# Altium PCB BLUENRG-LP_QFN48_VERS3_F_ANTENNA.PcbDoc (part 1 of 3)
Units mm, origin at the board's own origin, x right, y up, seen from the top; angles counter-clockwise.
Board outline 90.84 x 54.03 mm, 4 copper layers (Top Layer, Mid-Layer 1, Mid-Layer 2, Bottom Layer), stack 1.697 mm thick; 156 components, 123 nets, 503 pads, 649 vias.
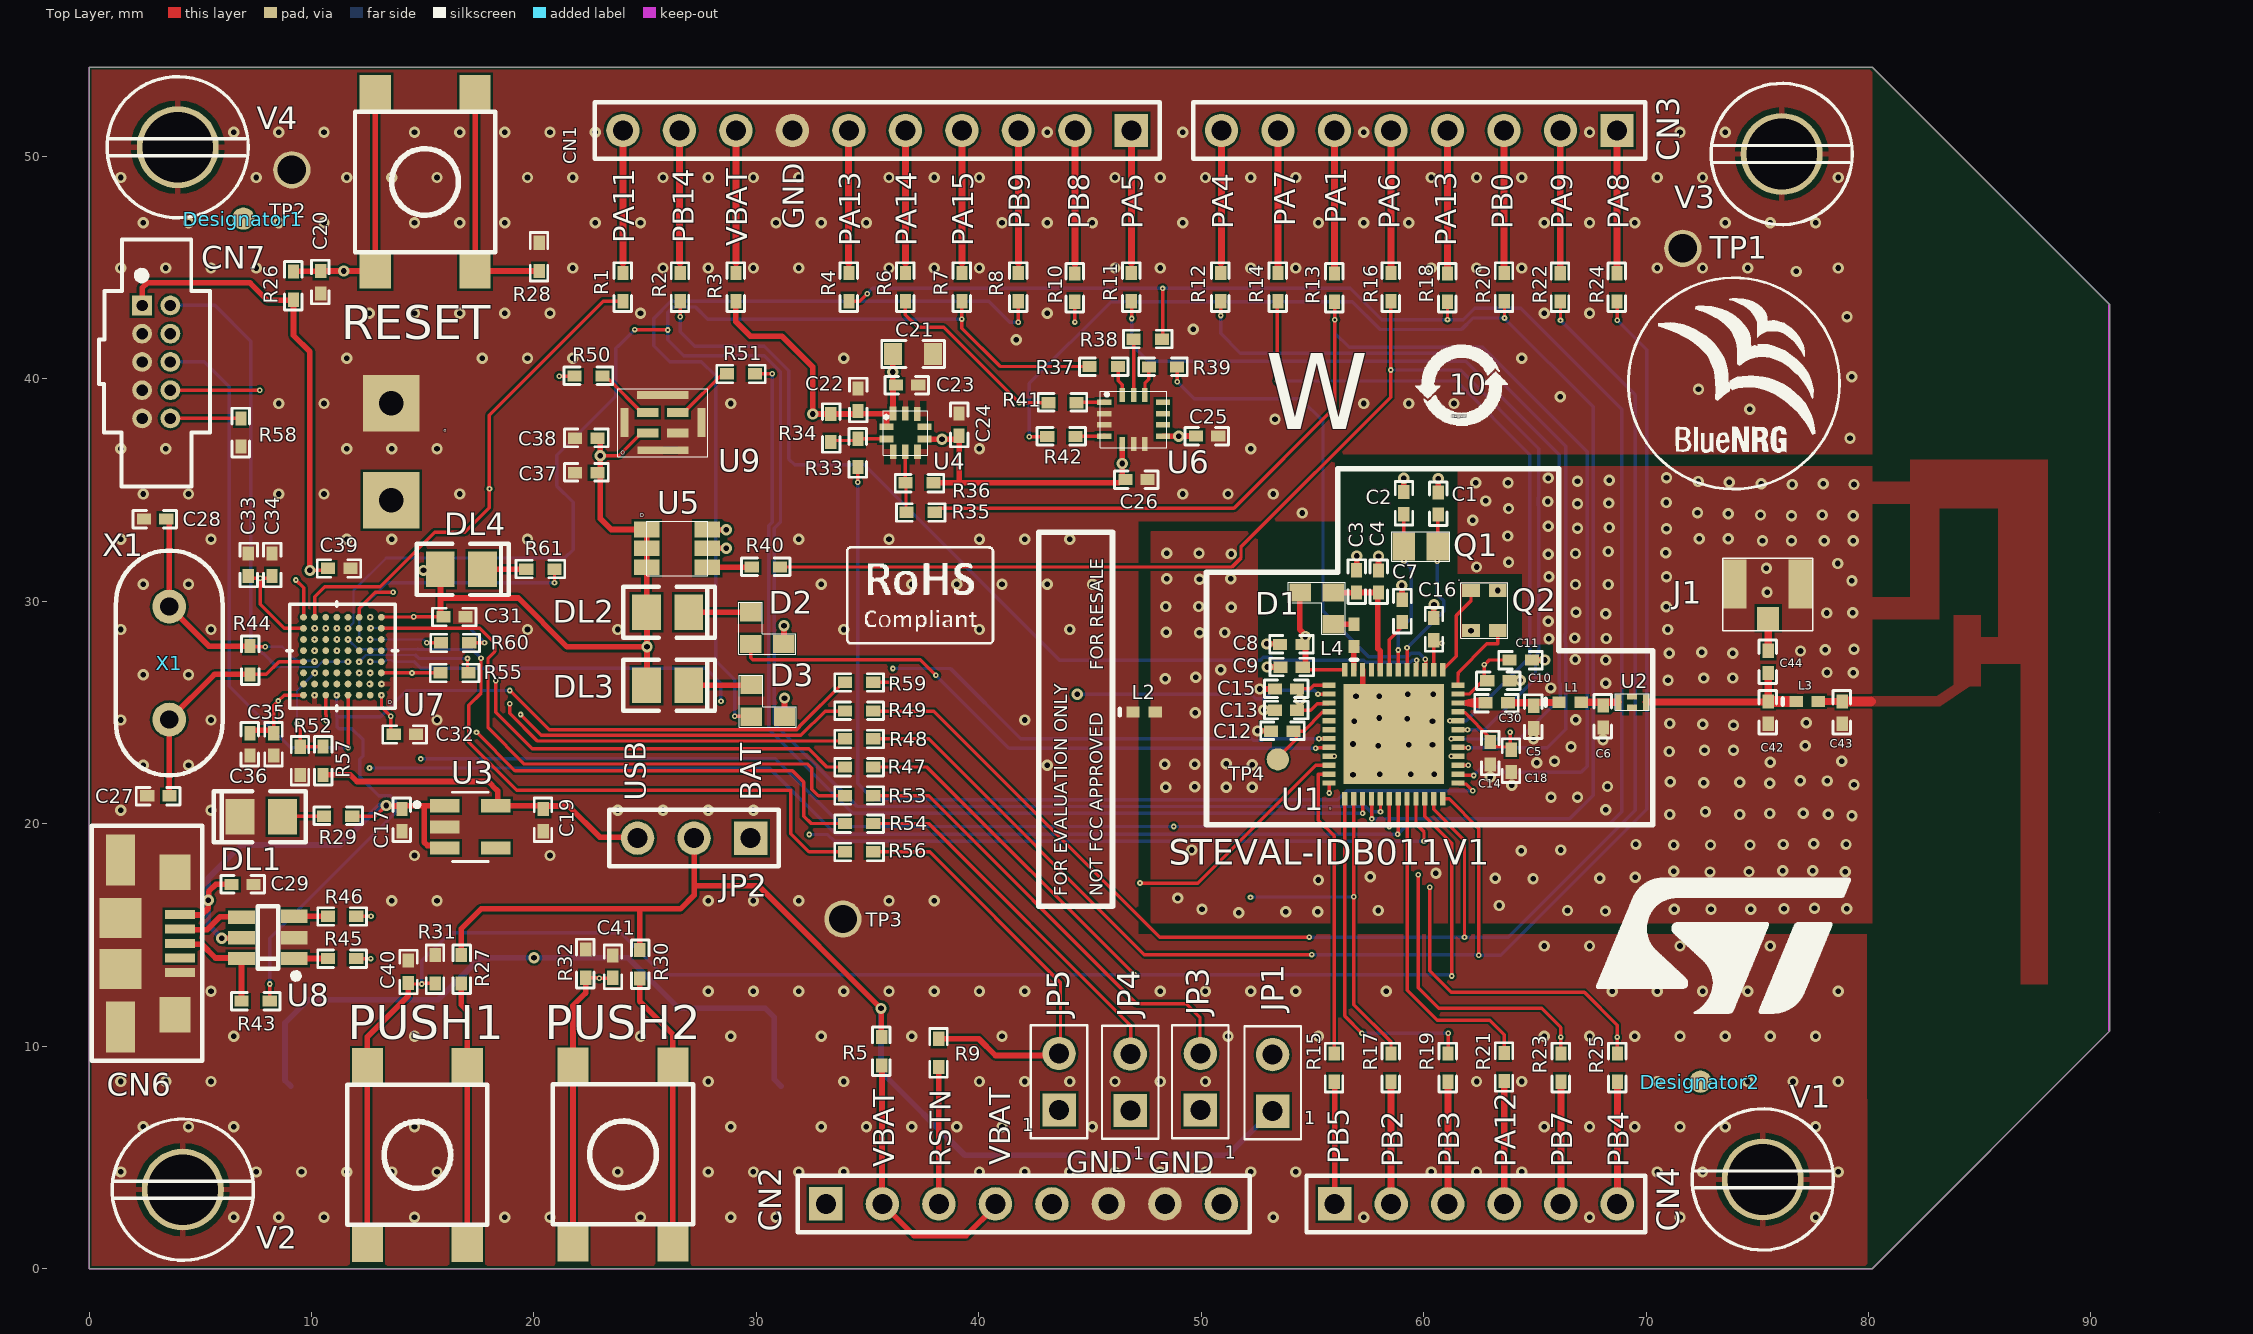
[diagram p0: Top Layer view]
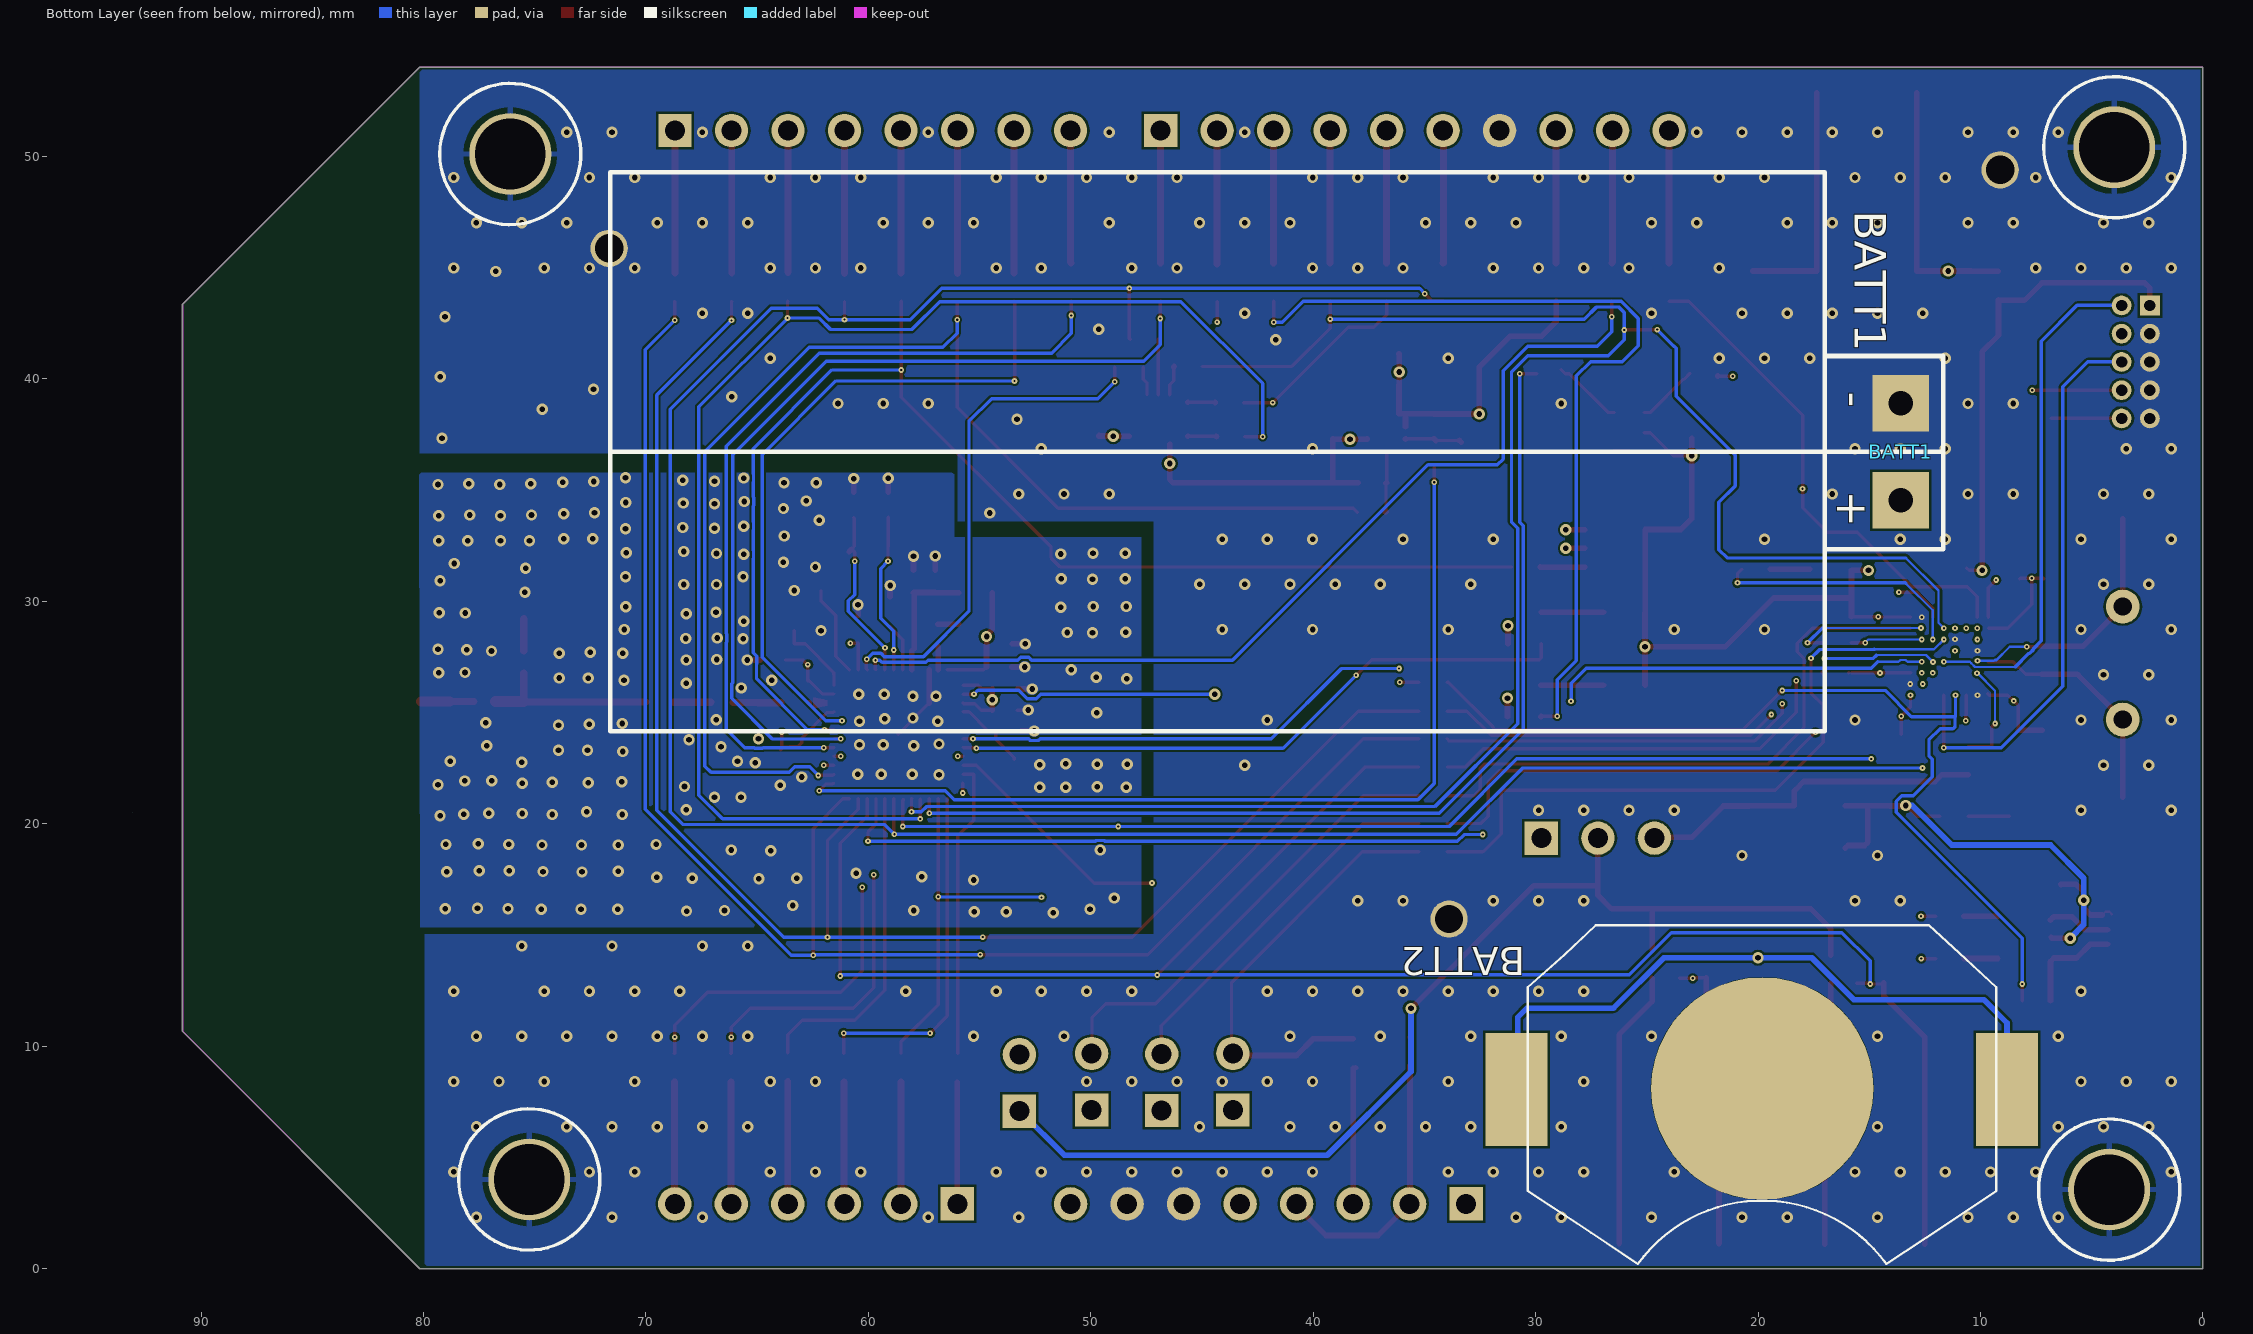
[diagram p1: Bottom Layer view, seen from below]
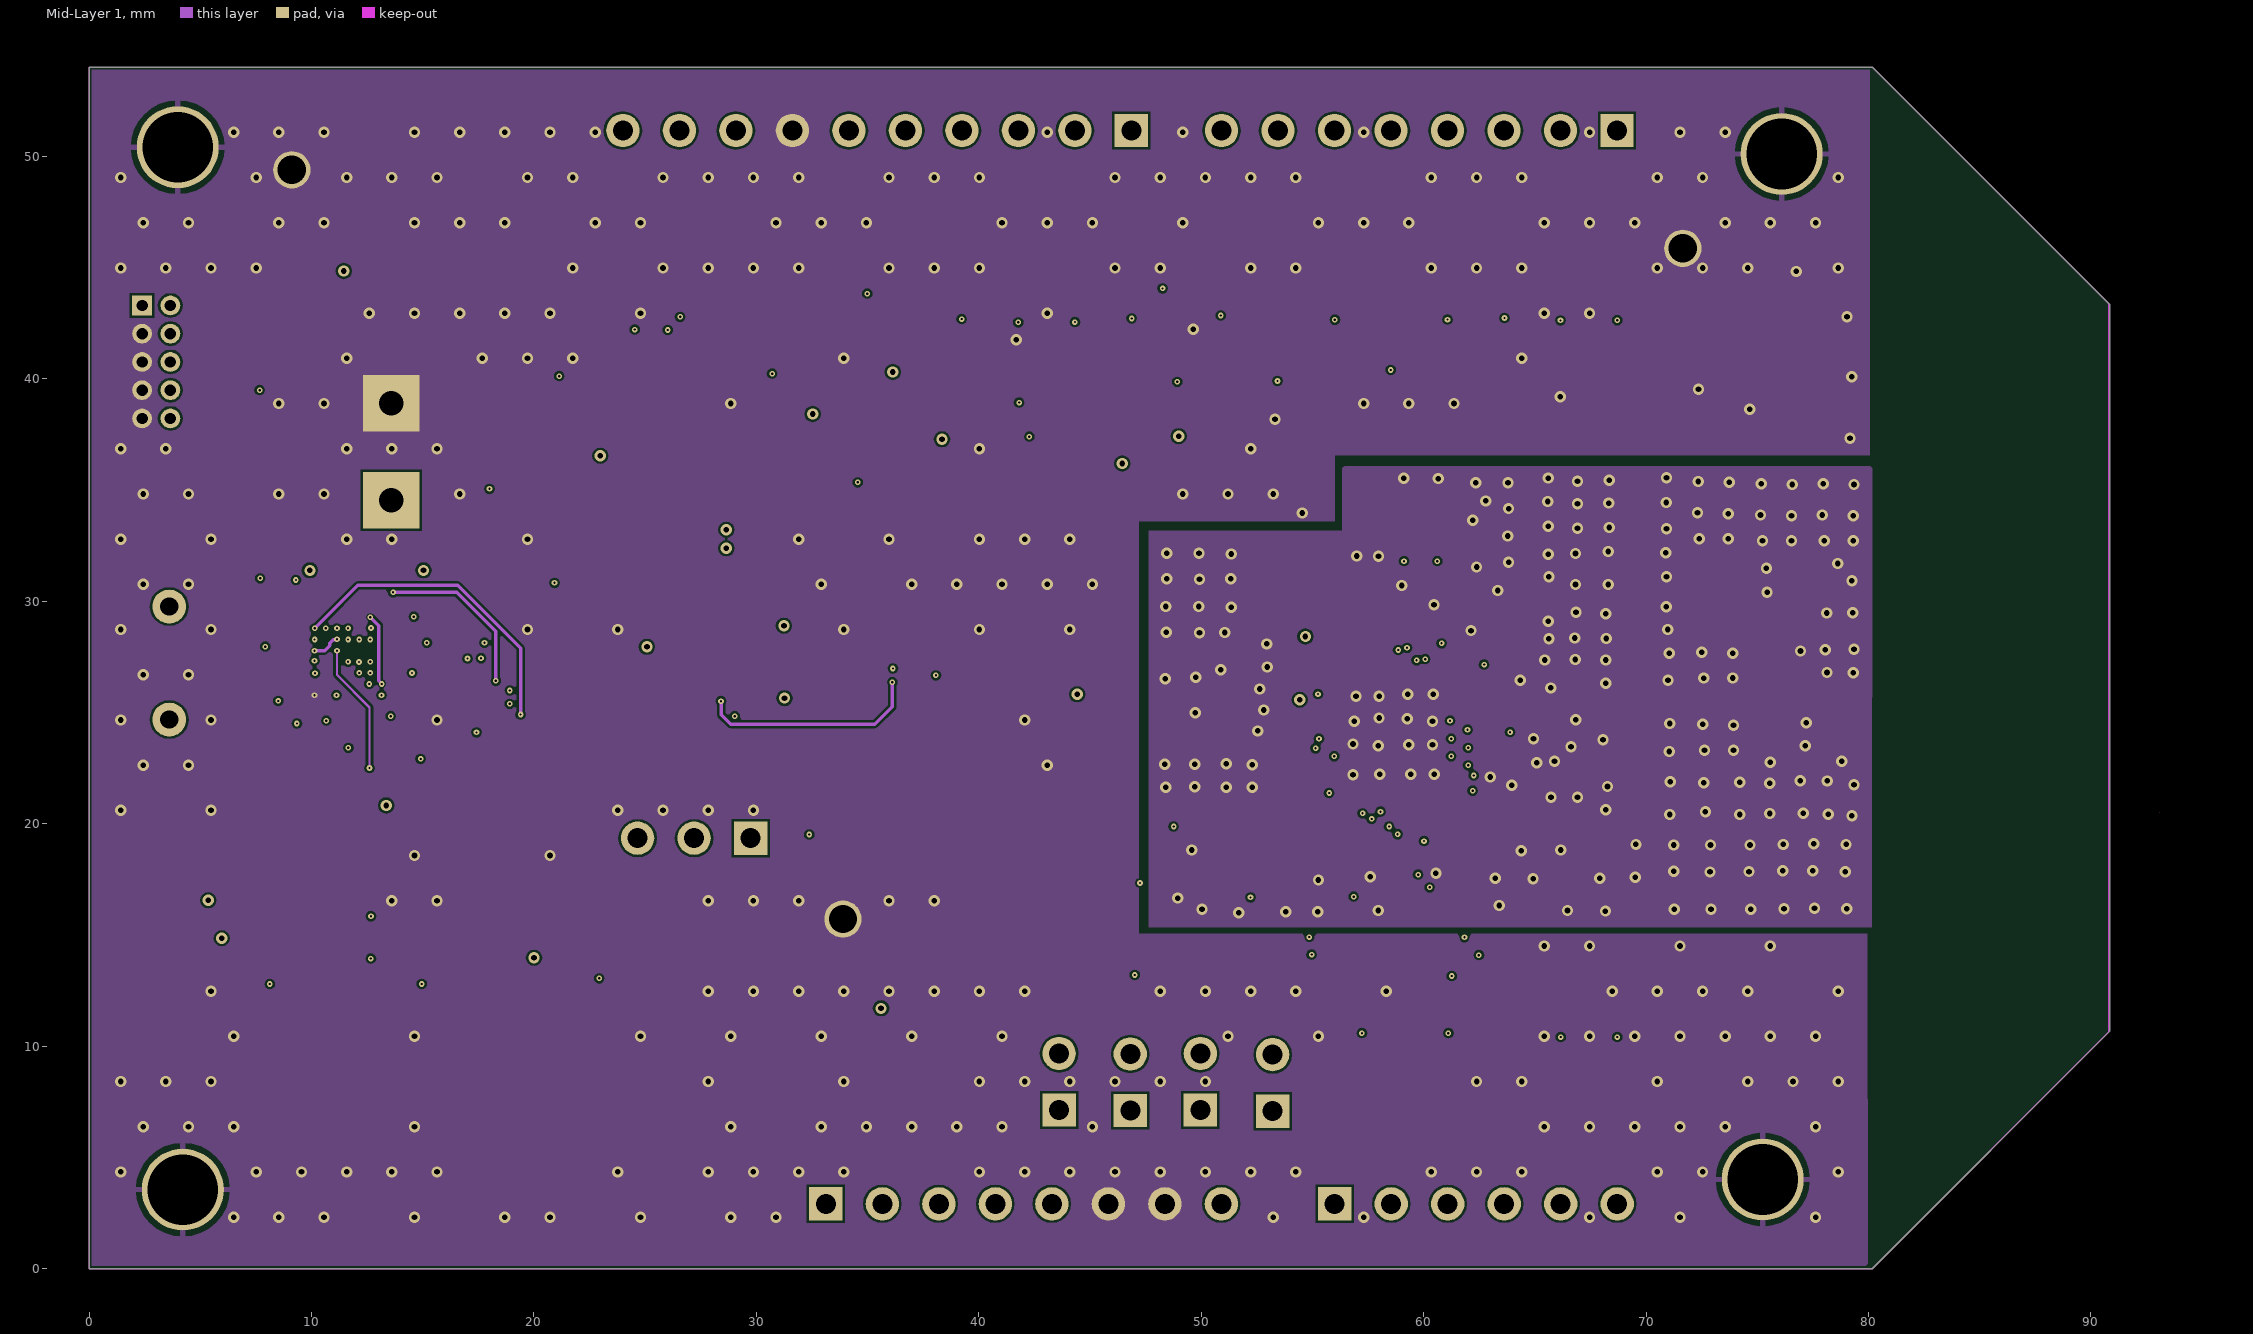
[diagram p2: Mid-Layer 1]
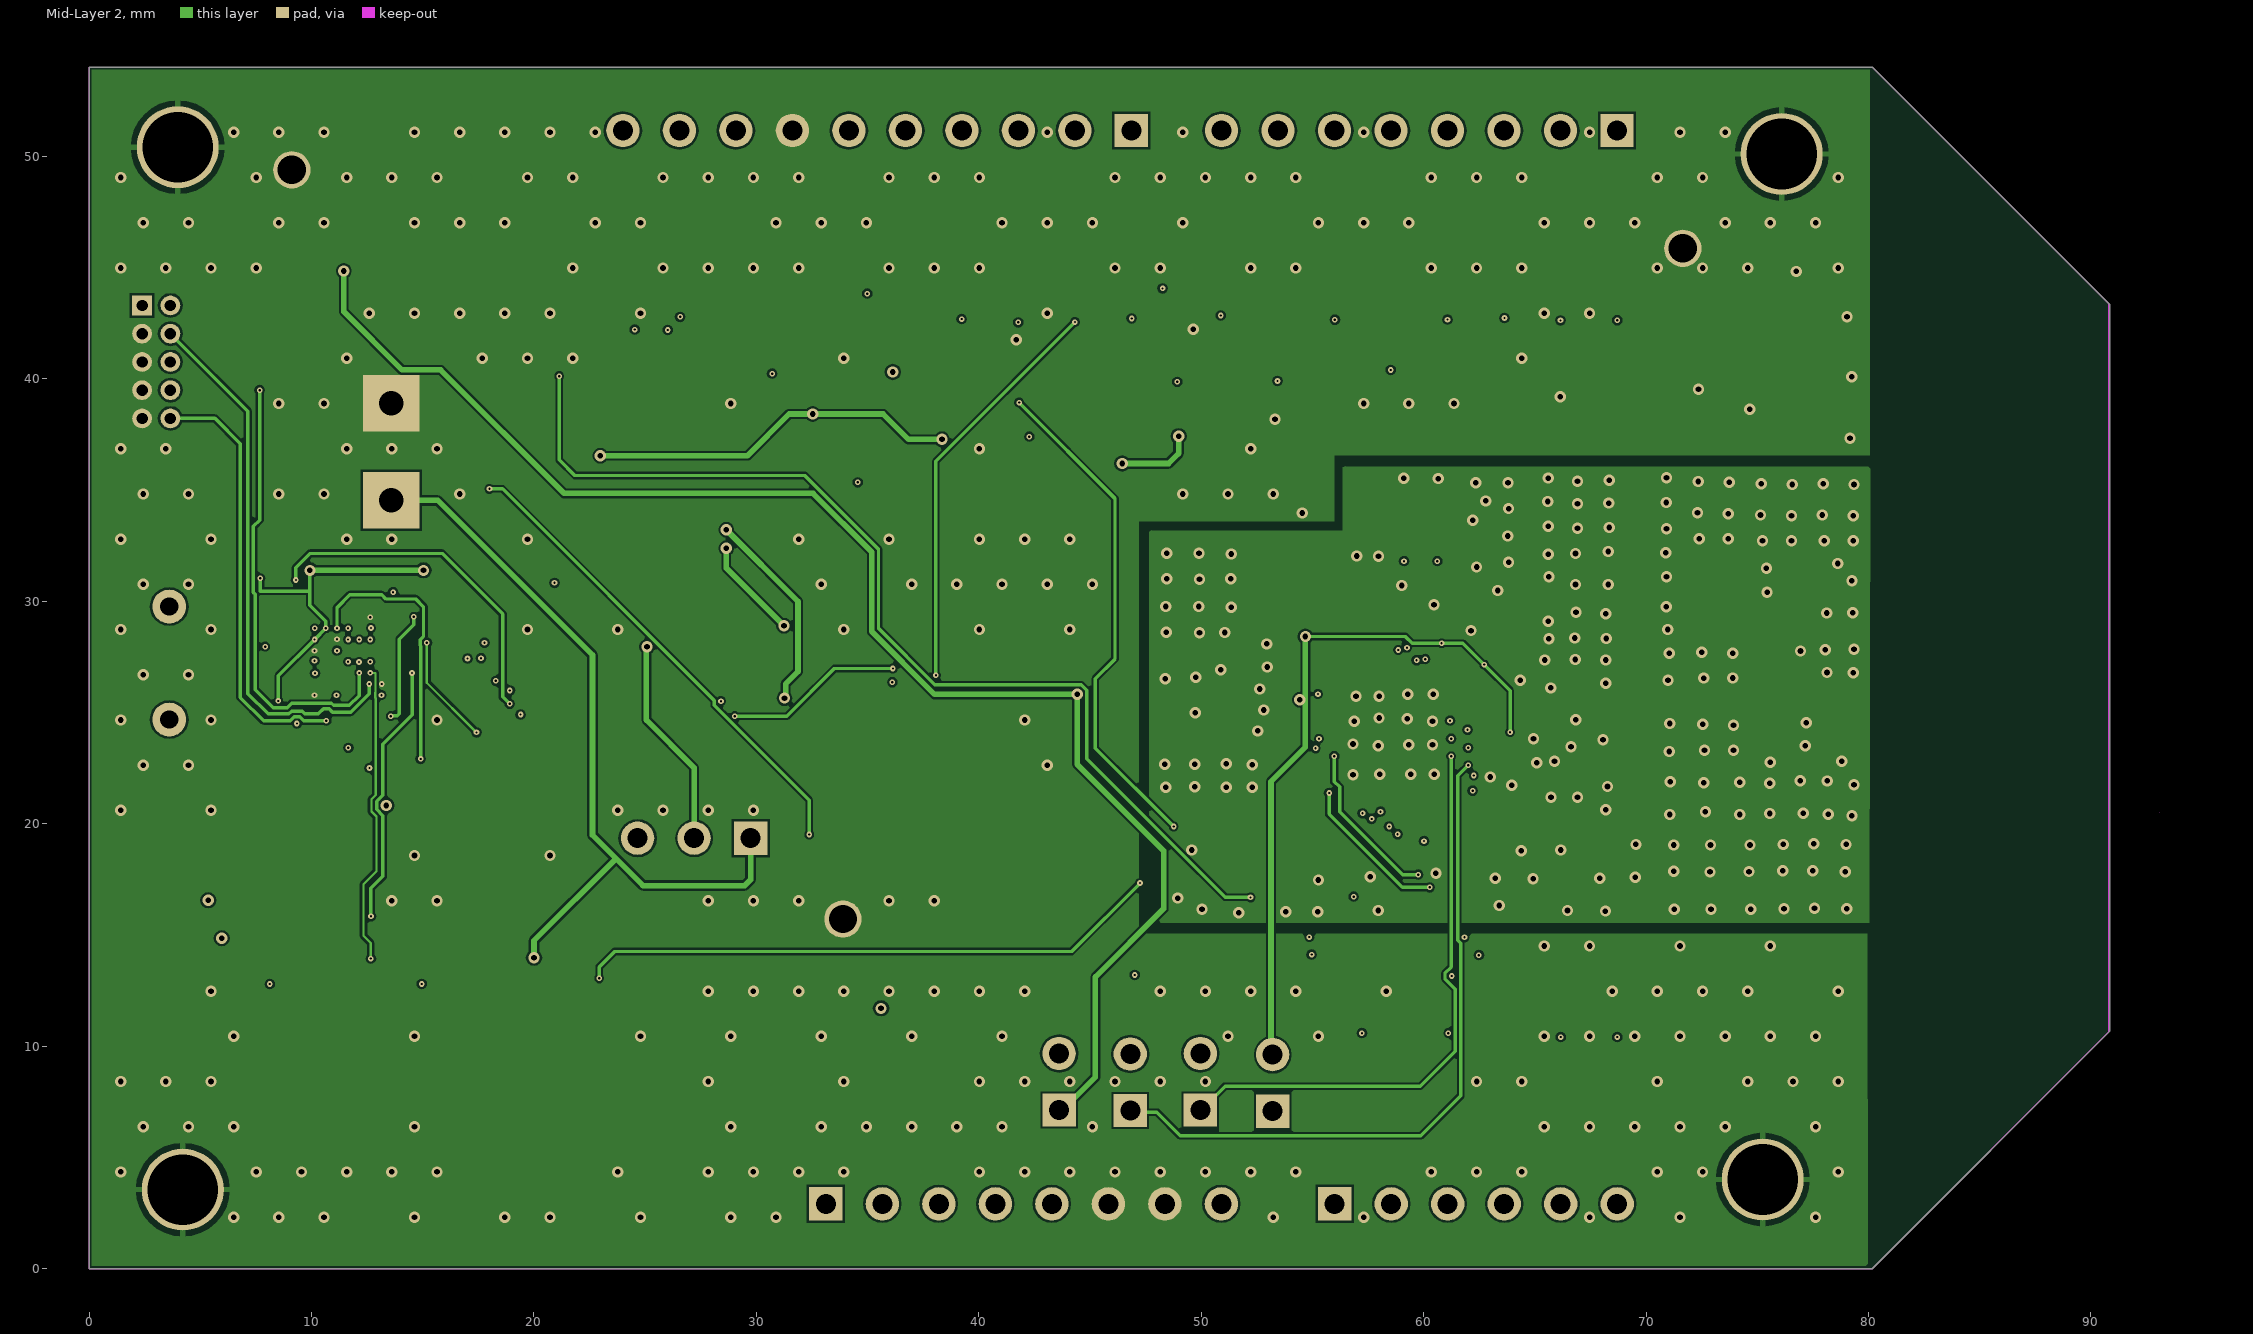
[diagram p3: Mid-Layer 2]

## Layer stack, top to bottom
Top Solder: solder mask 0.0102, Solder Resist, Dk 3.5
Top Layer: signal copper 0.0356
Dielectric 1: dielectric 0.2997, FR-4, Dk 4.3
Mid-Layer 1: signal copper 0.0178
Dielectric2: dielectric 0.9906, FR-4, Dk 4.3
Mid-Layer 2: signal copper 0.0178
Dielectric3: dielectric 0.2997, FR-4, Dk 4.3
Bottom Layer: signal copper 0.0356
Bottom Solder: solder mask 0.0102, Solder Resist, Dk 3.5

## Board outline
0,0 80.169,0 90.838,10.669 90.838,43.357 80.169,54.026 0,54.026
cut-out: 93.094,20.529

## Design rules (kind name [scope] priority, off if disabled: settings)
Clearance Clearance_2 [InNamedPolygon('NONET_TOP_LAYER_P040')] p1: gap=0 ignorepadtopadclearanceinfootprint=FALSE
Clearance Clearance_1 [InNamedPolygon('NONET_TOP_LAYER_P040') vs InNet('GND_RF')] p2: gap=0.254 ignorepadtopadclearanceinfootprint=FALSE except(0: Arc-Hole Track-Hole SMDPad-Hole THPad-Hole Via-Hole Fill-Hole Poly-Hole Region-Hole Text-Hole)
Clearance "Stitching GND_1" [IsStitchingVia and InNet('GND') vs (IsVia and (Not IsStitchingVia)) Or IsPad] p3: gap=0.102 ignorepadtopadclearanceinfootprint=FALSE except(0: SMDPad-Via)
Clearance "Stitching GND" [IsStitchingVia and InNet('GND_RF') vs (IsVia and (Not IsStitchingVia)) Or IsPad] p4: gap=0.102 ignorepadtopadclearanceinfootprint=FALSE
Clearance [All] p5: gap=0.102 ignorepadtopadclearanceinfootprint=FALSE
ComponentClearance [All] p1: gap=0.127 collisioncheckmode=3 verticalgap=0.127 showdistances=FALSE
HoleSize [All] p1: absolutevalues=TRUE maxlimit=5.08 minlimit=0.025 maxpercent=80.000 minpercent=20.000
HoleToHoleClearance [All] p1: gap=0.127 allowstackedmicrovias=TRUE
MinimumSolderMaskSliver [All] p1: minsoldermaskwidth=0
PlaneConnect [All] p1: planeconnectstyle=Relief reliefexpansion=2.54 reliefentries=4 reliefconductorwidth=2.54 reliefairgap=2.54
PolygonConnect [All] p1: connectstyle=Relief reliefconductorwidth=0.254 reliefentries=4 polygonreliefangle="90 Angle" airgapwidth=0.254
RoutingLayers RoutingLayers_1 [All] p1: top layer_v5=TRUE mid layer 1_v5=TRUE mid layer 2_v5=TRUE bottom layer_v5=TRUE
RoutingLayers [All] p2: top layer_v5=TRUE mid layer 1_v5=TRUE mid layer 2_v5=TRUE bottom layer_v5=TRUE
RoutingVias [All] p1: holewidth=0.711 width=1.27 viastyle="Through Hole" minholewidth=0 minwidth=0.254 maxholewidth=0.254 maxwidth=0.508
ShortCircuit [InNamedPolygon('NONET_TOP_LAYER_P040') vs InNamedPolygon('Top Layer-GND_RF')] p1: allowed=TRUE
SilkToSilkClearance [All] p1: silktosilkclearance=0
SilkToSolderMaskClearance [IsPad] p1: minsilkscreentomaskgap=0 clearancetoexposedcopper=TRUE
SolderMaskExpansion [All] p1: expansion=0
ViasUnderSMD VIA_UnderSMD_471 [(Name = 'X1-2')] p1: allowed=TRUE
ViasUnderSMD VIA_UnderSMD_470 [(Name = 'X1-1')] p2: allowed=FALSE
ViasUnderSMD VIA_UnderSMD_469 [(Name = 'V4-1')] p3: allowed=FALSE
ViasUnderSMD VIA_UnderSMD_468 [(Name = 'V3-1')] p4: allowed=FALSE
ViasUnderSMD VIA_UnderSMD_467 [(Name = 'V2-1')] p5: allowed=FALSE
ViasUnderSMD VIA_UnderSMD_466 [(Name = 'V1-1')] p6: allowed=FALSE
ViasUnderSMD VIA_UnderSMD_465 [(Name = 'U9-8')] p7: allowed=FALSE
ViasUnderSMD VIA_UnderSMD_464 [(Name = 'U9-7')] p8: allowed=FALSE
ViasUnderSMD VIA_UnderSMD_463 [(Name = 'U9-6')] p9: allowed=FALSE
ViasUnderSMD VIA_UnderSMD_462 [(Name = 'U9-5')] p10: allowed=FALSE
ViasUnderSMD VIA_UnderSMD_461 [(Name = 'U9-4')] p11: allowed=FALSE
ViasUnderSMD VIA_UnderSMD_460 [(Name = 'U9-3')] p12: allowed=FALSE
ViasUnderSMD VIA_UnderSMD_459 [(Name = 'U9-2')] p13: allowed=FALSE
ViasUnderSMD VIA_UnderSMD_458 [(Name = 'U9-1')] p14: allowed=FALSE
ViasUnderSMD VIA_UnderSMD_457 [(Name = 'U8-6')] p15: allowed=FALSE
ViasUnderSMD VIA_UnderSMD_456 [(Name = 'U8-5')] p16: allowed=FALSE
ViasUnderSMD VIA_UnderSMD_455 [(Name = 'U8-4')] p17: allowed=FALSE
ViasUnderSMD VIA_UnderSMD_454 [(Name = 'U8-3')] p18: allowed=FALSE
ViasUnderSMD VIA_UnderSMD_453 [(Name = 'U8-2')] p19: allowed=FALSE
ViasUnderSMD VIA_UnderSMD_452 [(Name = 'U8-1')] p20: allowed=FALSE
ViasUnderSMD VIA_UnderSMD_451 [(Name = 'U7-48')] p21: allowed=FALSE
ViasUnderSMD VIA_UnderSMD_450 [(Name = 'U7-47')] p22: allowed=FALSE
ViasUnderSMD VIA_UnderSMD_449 [(Name = 'U7-46')] p23: allowed=FALSE
ViasUnderSMD VIA_UnderSMD_448 [(Name = 'U7-45')] p24: allowed=FALSE
ViasUnderSMD VIA_UnderSMD_447 [(Name = 'U7-44')] p25: allowed=FALSE
ViasUnderSMD VIA_UnderSMD_446 [(Name = 'U7-43')] p26: allowed=FALSE
ViasUnderSMD VIA_UnderSMD_445 [(Name = 'U7-42')] p27: allowed=FALSE
ViasUnderSMD VIA_UnderSMD_444 [(Name = 'U7-41')] p28: allowed=FALSE
ViasUnderSMD VIA_UnderSMD_443 [(Name = 'U7-40')] p29: allowed=FALSE
ViasUnderSMD VIA_UnderSMD_442 [(Name = 'U7-39')] p30: allowed=FALSE
ViasUnderSMD VIA_UnderSMD_441 [(Name = 'U7-38')] p31: allowed=FALSE
ViasUnderSMD VIA_UnderSMD_440 [(Name = 'U7-37')] p32: allowed=FALSE
ViasUnderSMD VIA_UnderSMD_439 [(Name = 'U7-36')] p33: allowed=FALSE
ViasUnderSMD VIA_UnderSMD_438 [(Name = 'U7-35')] p34: allowed=FALSE
ViasUnderSMD VIA_UnderSMD_437 [(Name = 'U7-34')] p35: allowed=FALSE
ViasUnderSMD VIA_UnderSMD_436 [(Name = 'U7-33')] p36: allowed=FALSE
ViasUnderSMD VIA_UnderSMD_435 [(Name = 'U7-32')] p37: allowed=FALSE
ViasUnderSMD VIA_UnderSMD_434 [(Name = 'U7-31')] p38: allowed=FALSE
ViasUnderSMD VIA_UnderSMD_433 [(Name = 'U7-30')] p39: allowed=FALSE
ViasUnderSMD VIA_UnderSMD_432 [(Name = 'U7-29')] p40: allowed=FALSE
ViasUnderSMD VIA_UnderSMD_431 [(Name = 'U7-49')] p41: allowed=FALSE
ViasUnderSMD VIA_UnderSMD_430 [(Name = 'U7-28')] p42: allowed=FALSE
ViasUnderSMD VIA_UnderSMD_429 [(Name = 'U7-27')] p43: allowed=FALSE
ViasUnderSMD VIA_UnderSMD_428 [(Name = 'U7-26')] p44: allowed=FALSE
ViasUnderSMD VIA_UnderSMD_427 [(Name = 'U7-25')] p45: allowed=FALSE
ViasUnderSMD VIA_UnderSMD_426 [(Name = 'U7-24')] p46: allowed=FALSE
ViasUnderSMD VIA_UnderSMD_425 [(Name = 'U7-23')] p47: allowed=FALSE
ViasUnderSMD VIA_UnderSMD_424 [(Name = 'U7-22')] p48: allowed=FALSE
ViasUnderSMD VIA_UnderSMD_423 [(Name = 'U7-21')] p49: allowed=FALSE
ViasUnderSMD VIA_UnderSMD_422 [(Name = 'U7-20')] p50: allowed=FALSE
ViasUnderSMD VIA_UnderSMD_421 [(Name = 'U7-19')] p51: allowed=FALSE
ViasUnderSMD VIA_UnderSMD_420 [(Name = 'U7-18')] p52: allowed=FALSE
ViasUnderSMD VIA_UnderSMD_419 [(Name = 'U7-17')] p53: allowed=FALSE
ViasUnderSMD VIA_UnderSMD_418 [(Name = 'U7-16')] p54: allowed=FALSE
ViasUnderSMD VIA_UnderSMD_417 [(Name = 'U7-15')] p55: allowed=FALSE
ViasUnderSMD VIA_UnderSMD_416 [(Name = 'U7-14')] p56: allowed=FALSE
ViasUnderSMD VIA_UnderSMD_415 [(Name = 'U7-13')] p57: allowed=FALSE
ViasUnderSMD VIA_UnderSMD_414 [(Name = 'U7-12')] p58: allowed=FALSE
ViasUnderSMD VIA_UnderSMD_413 [(Name = 'U7-11')] p59: allowed=FALSE
ViasUnderSMD VIA_UnderSMD_412 [(Name = 'U7-10')] p60: allowed=FALSE
ViasUnderSMD VIA_UnderSMD_411 [(Name = 'U7-9')] p61: allowed=FALSE
ViasUnderSMD VIA_UnderSMD_410 [(Name = 'U7-8')] p62: allowed=FALSE
ViasUnderSMD VIA_UnderSMD_409 [(Name = 'U7-7')] p63: allowed=FALSE
ViasUnderSMD VIA_UnderSMD_408 [(Name = 'U7-6')] p64: allowed=FALSE
ViasUnderSMD VIA_UnderSMD_407 [(Name = 'U7-5')] p65: allowed=FALSE
ViasUnderSMD VIA_UnderSMD_406 [(Name = 'U7-4')] p66: allowed=FALSE
ViasUnderSMD VIA_UnderSMD_405 [(Name = 'U7-3')] p67: allowed=FALSE
ViasUnderSMD VIA_UnderSMD_404 [(Name = 'U7-2')] p68: allowed=FALSE
ViasUnderSMD VIA_UnderSMD_403 [(Name = 'U7-1')] p69: allowed=FALSE
ViasUnderSMD VIA_UnderSMD_402 [(Name = 'U6-14')] p70: allowed=FALSE
ViasUnderSMD VIA_UnderSMD_401 [(Name = 'U6-13')] p71: allowed=FALSE
ViasUnderSMD VIA_UnderSMD_400 [(Name = 'U6-12')] p72: allowed=FALSE
ViasUnderSMD VIA_UnderSMD_399 [(Name = 'U6-11')] p73: allowed=FALSE
ViasUnderSMD VIA_UnderSMD_398 [(Name = 'U6-10')] p74: allowed=FALSE
ViasUnderSMD VIA_UnderSMD_397 [(Name = 'U6-9')] p75: allowed=FALSE
ViasUnderSMD VIA_UnderSMD_396 [(Name = 'U6-8')] p76: allowed=FALSE
ViasUnderSMD VIA_UnderSMD_395 [(Name = 'U6-7')] p77: allowed=FALSE
ViasUnderSMD VIA_UnderSMD_394 [(Name = 'U6-6')] p78: allowed=FALSE
ViasUnderSMD VIA_UnderSMD_393 [(Name = 'U6-5')] p79: allowed=FALSE
ViasUnderSMD VIA_UnderSMD_392 [(Name = 'U6-4')] p80: allowed=FALSE
ViasUnderSMD VIA_UnderSMD_391 [(Name = 'U6-3')] p81: allowed=FALSE
ViasUnderSMD VIA_UnderSMD_390 [(Name = 'U6-2')] p82: allowed=FALSE
ViasUnderSMD VIA_UnderSMD_389 [(Name = 'U6-1')] p83: allowed=FALSE
ViasUnderSMD VIA_UnderSMD_388 [(Name = 'U5-6')] p84: allowed=FALSE
ViasUnderSMD VIA_UnderSMD_387 [(Name = 'U5-5')] p85: allowed=FALSE
ViasUnderSMD VIA_UnderSMD_386 [(Name = 'U5-4')] p86: allowed=FALSE
ViasUnderSMD VIA_UnderSMD_385 [(Name = 'U5-3')] p87: allowed=FALSE
ViasUnderSMD VIA_UnderSMD_384 [(Name = 'U5-2')] p88: allowed=FALSE
ViasUnderSMD VIA_UnderSMD_383 [(Name = 'U5-1')] p89: allowed=FALSE
ViasUnderSMD VIA_UnderSMD_382 [(Name = 'U4-10')] p90: allowed=FALSE
ViasUnderSMD VIA_UnderSMD_381 [(Name = 'U4-9')] p91: allowed=FALSE
ViasUnderSMD VIA_UnderSMD_380 [(Name = 'U4-8')] p92: allowed=FALSE
ViasUnderSMD VIA_UnderSMD_379 [(Name = 'U4-7')] p93: allowed=FALSE
ViasUnderSMD VIA_UnderSMD_378 [(Name = 'U4-6')] p94: allowed=FALSE
ViasUnderSMD VIA_UnderSMD_377 [(Name = 'U4-5')] p95: allowed=FALSE
ViasUnderSMD VIA_UnderSMD_376 [(Name = 'U4-4')] p96: allowed=FALSE
ViasUnderSMD VIA_UnderSMD_375 [(Name = 'U4-3')] p97: allowed=FALSE
ViasUnderSMD VIA_UnderSMD_374 [(Name = 'U4-2')] p98: allowed=FALSE
ViasUnderSMD VIA_UnderSMD_373 [(Name = 'U4-1')] p99: allowed=FALSE
ViasUnderSMD VIA_UnderSMD_372 [(Name = 'U3-7')] p100: allowed=FALSE
ViasUnderSMD VIA_UnderSMD_371 [(Name = 'U3-6')] p101: allowed=FALSE
ViasUnderSMD VIA_UnderSMD_370 [(Name = 'U3-5')] p102: allowed=FALSE
ViasUnderSMD VIA_UnderSMD_369 [(Name = 'U3-1')] p103: allowed=FALSE
ViasUnderSMD VIA_UnderSMD_368 [(Name = 'U3-2')] p104: allowed=FALSE
ViasUnderSMD VIA_UnderSMD_367 [(Name = 'U3-3')] p105: allowed=FALSE
ViasUnderSMD VIA_UnderSMD_366 [(Name = 'U3-4')] p106: allowed=FALSE
ViasUnderSMD VIA_UnderSMD_365 [(Name = 'U2-3')] p107: allowed=FALSE
ViasUnderSMD VIA_UnderSMD_364 [(Name = 'U2-1')] p108: allowed=FALSE
ViasUnderSMD VIA_UnderSMD_363 [(Name = 'U2-2')] p109: allowed=FALSE
ViasUnderSMD VIA_UnderSMD_362 [(Name = 'U2-4')] p110: allowed=FALSE
ViasUnderSMD VIA_UnderSMD_361 [(Name = 'U1-48')] p111: allowed=FALSE
ViasUnderSMD VIA_UnderSMD_360 [(Name = 'U1-47')] p112: allowed=FALSE
ViasUnderSMD VIA_UnderSMD_359 [(Name = 'U1-46')] p113: allowed=FALSE
ViasUnderSMD VIA_UnderSMD_358 [(Name = 'U1-45')] p114: allowed=FALSE
ViasUnderSMD VIA_UnderSMD_357 [(Name = 'U1-44')] p115: allowed=FALSE
ViasUnderSMD VIA_UnderSMD_356 [(Name = 'U1-43')] p116: allowed=FALSE
ViasUnderSMD VIA_UnderSMD_355 [(Name = 'U1-42')] p117: allowed=FALSE
ViasUnderSMD VIA_UnderSMD_354 [(Name = 'U1-41')] p118: allowed=FALSE
ViasUnderSMD VIA_UnderSMD_353 [(Name = 'U1-40')] p119: allowed=FALSE
ViasUnderSMD VIA_UnderSMD_352 [(Name = 'U1-39')] p120: allowed=FALSE
ViasUnderSMD VIA_UnderSMD_351 [(Name = 'U1-38')] p121: allowed=FALSE
ViasUnderSMD VIA_UnderSMD_350 [(Name = 'U1-37')] p122: allowed=FALSE
ViasUnderSMD VIA_UnderSMD_349 [(Name = 'U1-36')] p123: allowed=FALSE
ViasUnderSMD VIA_UnderSMD_348 [(Name = 'U1-35')] p124: allowed=FALSE
ViasUnderSMD VIA_UnderSMD_347 [(Name = 'U1-34')] p125: allowed=FALSE
ViasUnderSMD VIA_UnderSMD_346 [(Name = 'U1-33')] p126: allowed=FALSE
ViasUnderSMD VIA_UnderSMD_345 [(Name = 'U1-32')] p127: allowed=FALSE
ViasUnderSMD VIA_UnderSMD_344 [(Name = 'U1-31')] p128: allowed=FALSE
ViasUnderSMD VIA_UnderSMD_343 [(Name = 'U1-30')] p129: allowed=FALSE
ViasUnderSMD VIA_UnderSMD_342 [(Name = 'U1-29')] p130: allowed=FALSE
ViasUnderSMD VIA_UnderSMD_341 [(Name = 'U1-49')] p131: allowed=FALSE
ViasUnderSMD VIA_UnderSMD_340 [(Name = 'U1-28')] p132: allowed=FALSE
ViasUnderSMD VIA_UnderSMD_339 [(Name = 'U1-27')] p133: allowed=FALSE
ViasUnderSMD VIA_UnderSMD_338 [(Name = 'U1-26')] p134: allowed=FALSE
ViasUnderSMD VIA_UnderSMD_337 [(Name = 'U1-25')] p135: allowed=FALSE
ViasUnderSMD VIA_UnderSMD_336 [(Name = 'U1-24')] p136: allowed=FALSE
ViasUnderSMD VIA_UnderSMD_335 [(Name = 'U1-23')] p137: allowed=FALSE
ViasUnderSMD VIA_UnderSMD_334 [(Name = 'U1-22')] p138: allowed=FALSE
ViasUnderSMD VIA_UnderSMD_333 [(Name = 'U1-21')] p139: allowed=FALSE
ViasUnderSMD VIA_UnderSMD_332 [(Name = 'U1-20')] p140: allowed=FALSE
ViasUnderSMD VIA_UnderSMD_331 [(Name = 'U1-19')] p141: allowed=FALSE
ViasUnderSMD VIA_UnderSMD_330 [(Name = 'U1-18')] p142: allowed=FALSE
ViasUnderSMD VIA_UnderSMD_329 [(Name = 'U1-17')] p143: allowed=FALSE
ViasUnderSMD VIA_UnderSMD_328 [(Name = 'U1-16')] p144: allowed=FALSE
ViasUnderSMD VIA_UnderSMD_327 [(Name = 'U1-15')] p145: allowed=FALSE
ViasUnderSMD VIA_UnderSMD_326 [(Name = 'U1-14')] p146: allowed=FALSE
ViasUnderSMD VIA_UnderSMD_325 [(Name = 'U1-13')] p147: allowed=FALSE
ViasUnderSMD VIA_UnderSMD_324 [(Name = 'U1-12')] p148: allowed=FALSE
ViasUnderSMD VIA_UnderSMD_323 [(Name = 'U1-11')] p149: allowed=FALSE
ViasUnderSMD VIA_UnderSMD_322 [(Name = 'U1-10')] p150: allowed=FALSE
ViasUnderSMD VIA_UnderSMD_321 [(Name = 'U1-9')] p151: allowed=FALSE
ViasUnderSMD VIA_UnderSMD_320 [(Name = 'U1-8')] p152: allowed=FALSE
ViasUnderSMD VIA_UnderSMD_319 [(Name = 'U1-7')] p153: allowed=FALSE
ViasUnderSMD VIA_UnderSMD_318 [(Name = 'U1-6')] p154: allowed=FALSE
ViasUnderSMD VIA_UnderSMD_317 [(Name = 'U1-5')] p155: allowed=FALSE
ViasUnderSMD VIA_UnderSMD_316 [(Name = 'U1-4')] p156: allowed=FALSE
ViasUnderSMD VIA_UnderSMD_315 [(Name = 'U1-3')] p157: allowed=FALSE
ViasUnderSMD VIA_UnderSMD_314 [(Name = 'U1-2')] p158: allowed=FALSE
ViasUnderSMD VIA_UnderSMD_313 [(Name = 'U1-1')] p159: allowed=FALSE
ViasUnderSMD VIA_UnderSMD_312 [(Name = 'TP3-1')] p160: allowed=FALSE
ViasUnderSMD VIA_UnderSMD_311 [(Name = 'TP2-1')] p161: allowed=FALSE
ViasUnderSMD VIA_UnderSMD_310 [(Name = 'TP1-1')] p162: allowed=FALSE
ViasUnderSMD VIA_UnderSMD_309 [(Name = 'SW3-4')] p163: allowed=FALSE
ViasUnderSMD VIA_UnderSMD_308 [(Name = 'SW3-3')] p164: allowed=FALSE
ViasUnderSMD VIA_UnderSMD_307 [(Name = 'SW3-2')] p165: allowed=FALSE
ViasUnderSMD VIA_UnderSMD_306 [(Name = 'SW3-1')] p166: allowed=FALSE
ViasUnderSMD VIA_UnderSMD_305 [(Name = 'SW2-4')] p167: allowed=FALSE
ViasUnderSMD VIA_UnderSMD_304 [(Name = 'SW2-3')] p168: allowed=FALSE
ViasUnderSMD VIA_UnderSMD_303 [(Name = 'SW2-2')] p169: allowed=FALSE
ViasUnderSMD VIA_UnderSMD_302 [(Name = 'SW2-1')] p170: allowed=FALSE
ViasUnderSMD VIA_UnderSMD_301 [(Name = 'SW1-4')] p171: allowed=FALSE
ViasUnderSMD VIA_UnderSMD_300 [(Name = 'SW1-3')] p172: allowed=FALSE
ViasUnderSMD VIA_UnderSMD_299 [(Name = 'SW1-2')] p173: allowed=FALSE
ViasUnderSMD VIA_UnderSMD_298 [(Name = 'SW1-1')] p174: allowed=FALSE
ViasUnderSMD VIA_UnderSMD_297 [(Name = 'R61-2')] p175: allowed=FALSE
ViasUnderSMD VIA_UnderSMD_296 [(Name = 'R61-1')] p176: allowed=FALSE
ViasUnderSMD VIA_UnderSMD_295 [(Name = 'R60-2')] p177: allowed=FALSE
ViasUnderSMD VIA_UnderSMD_294 [(Name = 'R60-1')] p178: allowed=FALSE
ViasUnderSMD VIA_UnderSMD_293 [(Name = 'R59-2')] p179: allowed=FALSE
ViasUnderSMD VIA_UnderSMD_292 [(Name = 'R59-1')] p180: allowed=FALSE
ViasUnderSMD VIA_UnderSMD_291 [(Name = 'R58-2')] p181: allowed=FALSE
ViasUnderSMD VIA_UnderSMD_290 [(Name = 'R58-1')] p182: allowed=FALSE
ViasUnderSMD VIA_UnderSMD_289 [(Name = 'R57-2')] p183: allowed=FALSE
ViasUnderSMD VIA_UnderSMD_288 [(Name = 'R57-1')] p184: allowed=FALSE
ViasUnderSMD VIA_UnderSMD_287 [(Name = 'R56-2')] p185: allowed=FALSE
ViasUnderSMD VIA_UnderSMD_286 [(Name = 'R56-1')] p186: allowed=FALSE
ViasUnderSMD VIA_UnderSMD_285 [(Name = 'R55-2')] p187: allowed=FALSE
ViasUnderSMD VIA_UnderSMD_284 [(Name = 'R55-1')] p188: allowed=FALSE
ViasUnderSMD VIA_UnderSMD_283 [(Name = 'R54-2')] p189: allowed=FALSE
ViasUnderSMD VIA_UnderSMD_282 [(Name = 'R54-1')] p190: allowed=FALSE
ViasUnderSMD VIA_UnderSMD_281 [(Name = 'R53-2')] p191: allowed=FALSE
ViasUnderSMD VIA_UnderSMD_280 [(Name = 'R53-1')] p192: allowed=FALSE
ViasUnderSMD VIA_UnderSMD_279 [(Name = 'R52-2')] p193: allowed=FALSE
ViasUnderSMD VIA_UnderSMD_278 [(Name = 'R52-1')] p194: allowed=FALSE
ViasUnderSMD VIA_UnderSMD_277 [(Name = 'R51-2')] p195: allowed=FALSE
ViasUnderSMD VIA_UnderSMD_276 [(Name = 'R51-1')] p196: allowed=FALSE
ViasUnderSMD VIA_UnderSMD_275 [(Name = 'R50-2')] p197: allowed=FALSE
ViasUnderSMD VIA_UnderSMD_274 [(Name = 'R50-1')] p198: allowed=FALSE
ViasUnderSMD VIA_UnderSMD_273 [(Name = 'R49-2')] p199: allowed=FALSE
ViasUnderSMD VIA_UnderSMD_272 [(Name = 'R49-1')] p200: allowed=FALSE
ViasUnderSMD VIA_UnderSMD_271 [(Name = 'R48-2')] p201: allowed=FALSE
ViasUnderSMD VIA_UnderSMD_270 [(Name = 'R48-1')] p202: allowed=FALSE
ViasUnderSMD VIA_UnderSMD_269 [(Name = 'R47-2')] p203: allowed=FALSE
ViasUnderSMD VIA_UnderSMD_268 [(Name = 'R47-1')] p204: allowed=FALSE
ViasUnderSMD VIA_UnderSMD_267 [(Name = 'R46-2')] p205: allowed=FALSE
ViasUnderSMD VIA_UnderSMD_266 [(Name = 'R46-1')] p206: allowed=FALSE
ViasUnderSMD VIA_UnderSMD_265 [(Name = 'R45-2')] p207: allowed=FALSE
ViasUnderSMD VIA_UnderSMD_264 [(Name = 'R45-1')] p208: allowed=FALSE
ViasUnderSMD VIA_UnderSMD_263 [(Name = 'R44-2')] p209: allowed=FALSE
ViasUnderSMD VIA_UnderSMD_262 [(Name = 'R44-1')] p210: allowed=FALSE
ViasUnderSMD VIA_UnderSMD_261 [(Name = 'R43-2')] p211: allowed=FALSE
ViasUnderSMD VIA_UnderSMD_260 [(Name = 'R43-1')] p212: allowed=FALSE
ViasUnderSMD VIA_UnderSMD_259 [(Name = 'R42-2')] p213: allowed=FALSE
ViasUnderSMD VIA_UnderSMD_258 [(Name = 'R42-1')] p214: allowed=FALSE
ViasUnderSMD VIA_UnderSMD_257 [(Name = 'R41-2')] p215: allowed=FALSE
ViasUnderSMD VIA_UnderSMD_256 [(Name = 'R41-1')] p216: allowed=FALSE
ViasUnderSMD VIA_UnderSMD_255 [(Name = 'R40-2')] p217: allowed=FALSE
ViasUnderSMD VIA_UnderSMD_254 [(Name = 'R40-1')] p218: allowed=FALSE
ViasUnderSMD VIA_UnderSMD_253 [(Name = 'R39-2')] p219: allowed=FALSE
ViasUnderSMD VIA_UnderSMD_252 [(Name = 'R39-1')] p220: allowed=FALSE
ViasUnderSMD VIA_UnderSMD_251 [(Name = 'R38-2')] p221: allowed=FALSE
ViasUnderSMD VIA_UnderSMD_250 [(Name = 'R38-1')] p222: allowed=FALSE
ViasUnderSMD VIA_UnderSMD_249 [(Name = 'R37-2')] p223: allowed=FALSE
ViasUnderSMD VIA_UnderSMD_248 [(Name = 'R37-1')] p224: allowed=FALSE
ViasUnderSMD VIA_UnderSMD_247 [(Name = 'R36-2')] p225: allowed=FALSE
ViasUnderSMD VIA_UnderSMD_246 [(Name = 'R36-1')] p226: allowed=FALSE
ViasUnderSMD VIA_UnderSMD_245 [(Name = 'R35-2')] p227: allowed=FALSE
ViasUnderSMD VIA_UnderSMD_244 [(Name = 'R35-1')] p228: allowed=FALSE
ViasUnderSMD VIA_UnderSMD_243 [(Name = 'R34-2')] p229: allowed=FALSE
ViasUnderSMD VIA_UnderSMD_242 [(Name = 'R34-1')] p230: allowed=FALSE
ViasUnderSMD VIA_UnderSMD_241 [(Name = 'R33-2')] p231: allowed=FALSE
ViasUnderSMD VIA_UnderSMD_240 [(Name = 'R33-1')] p232: allowed=FALSE
ViasUnderSMD VIA_UnderSMD_239 [(Name = 'R32-2')] p233: allowed=FALSE
ViasUnderSMD VIA_UnderSMD_238 [(Name = 'R32-1')] p234: allowed=FALSE
ViasUnderSMD VIA_UnderSMD_237 [(Name = 'R31-2')] p235: allowed=FALSE
ViasUnderSMD VIA_UnderSMD_236 [(Name = 'R31-1')] p236: allowed=FALSE
ViasUnderSMD VIA_UnderSMD_235 [(Name = 'R30-2')] p237: allowed=FALSE
ViasUnderSMD VIA_UnderSMD_234 [(Name = 'R30-1')] p238: allowed=FALSE
ViasUnderSMD VIA_UnderSMD_233 [(Name = 'R29-2')] p239: allowed=FALSE
ViasUnderSMD VIA_UnderSMD_232 [(Name = 'R29-1')] p240: allowed=FALSE
ViasUnderSMD VIA_UnderSMD_231 [(Name = 'R28-2')] p241: allowed=FALSE
ViasUnderSMD VIA_UnderSMD_230 [(Name = 'R28-1')] p242: allowed=FALSE
ViasUnderSMD VIA_UnderSMD_229 [(Name = 'R27-2')] p243: allowed=FALSE
ViasUnderSMD VIA_UnderSMD_228 [(Name = 'R27-1')] p244: allowed=FALSE
ViasUnderSMD VIA_UnderSMD_227 [(Name = 'R26-2')] p245: allowed=FALSE
ViasUnderSMD VIA_UnderSMD_226 [(Name = 'R26-1')] p246: allowed=FALSE
ViasUnderSMD VIA_UnderSMD_225 [(Name = 'R25-2')] p247: allowed=FALSE
ViasUnderSMD VIA_UnderSMD_224 [(Name = 'R25-1')] p248: allowed=FALSE
ViasUnderSMD VIA_UnderSMD_223 [(Name = 'R24-2')] p249: allowed=FALSE
ViasUnderSMD VIA_UnderSMD_222 [(Name = 'R24-1')] p250: allowed=FALSE
ViasUnderSMD VIA_UnderSMD_221 [(Name = 'R23-2')] p251: allowed=FALSE
ViasUnderSMD VIA_UnderSMD_220 [(Name = 'R23-1')] p252: allowed=FALSE
ViasUnderSMD VIA_UnderSMD_219 [(Name = 'R22-2')] p253: allowed=FALSE
ViasUnderSMD VIA_UnderSMD_218 [(Name = 'R22-1')] p254: allowed=FALSE
ViasUnderSMD VIA_UnderSMD_217 [(Name = 'R21-2')] p255: allowed=FALSE
ViasUnderSMD VIA_UnderSMD_216 [(Name = 'R21-1')] p256: allowed=FALSE
ViasUnderSMD VIA_UnderSMD_215 [(Name = 'R20-2')] p257: allowed=FALSE
ViasUnderSMD VIA_UnderSMD_214 [(Name = 'R20-1')] p258: allowed=FALSE
ViasUnderSMD VIA_UnderSMD_213 [(Name = 'R19-2')] p259: allowed=FALSE
ViasUnderSMD VIA_UnderSMD_212 [(Name = 'R19-1')] p260: allowed=FALSE
ViasUnderSMD VIA_UnderSMD_211 [(Name = 'R18-2')] p261: allowed=FALSE
ViasUnderSMD VIA_UnderSMD_210 [(Name = 'R18-1')] p262: allowed=FALSE
ViasUnderSMD VIA_UnderSMD_209 [(Name = 'R17-2')] p263: allowed=FALSE
ViasUnderSMD VIA_UnderSMD_208 [(Name = 'R17-1')] p264: allowed=FALSE
ViasUnderSMD VIA_UnderSMD_207 [(Name = 'R16-2')] p265: allowed=FALSE
ViasUnderSMD VIA_UnderSMD_206 [(Name = 'R16-1')] p266: allowed=FALSE
ViasUnderSMD VIA_UnderSMD_205 [(Name = 'R15-2')] p267: allowed=FALSE
ViasUnderSMD VIA_UnderSMD_204 [(Name = 'R15-1')] p268: allowed=FALSE
ViasUnderSMD VIA_UnderSMD_203 [(Name = 'R14-2')] p269: allowed=FALSE
ViasUnderSMD VIA_UnderSMD_202 [(Name = 'R14-1')] p270: allowed=FALSE
ViasUnderSMD VIA_UnderSMD_201 [(Name = 'R13-2')] p271: allowed=FALSE
ViasUnderSMD VIA_UnderSMD_200 [(Name = 'R13-1')] p272: allowed=FALSE
ViasUnderSMD VIA_UnderSMD_199 [(Name = 'R12-2')] p273: allowed=FALSE
ViasUnderSMD VIA_UnderSMD_198 [(Name = 'R12-1')] p274: allowed=FALSE
ViasUnderSMD VIA_UnderSMD_197 [(Name = 'R11-2')] p275: allowed=FALSE
ViasUnderSMD VIA_UnderSMD_196 [(Name = 'R11-1')] p276: allowed=FALSE
ViasUnderSMD VIA_UnderSMD_195 [(Name = 'R10-2')] p277: allowed=FALSE
ViasUnderSMD VIA_UnderSMD_194 [(Name = 'R10-1')] p278: allowed=FALSE
ViasUnderSMD VIA_UnderSMD_193 [(Name = 'R9-2')] p279: allowed=FALSE
ViasUnderSMD VIA_UnderSMD_192 [(Name = 'R9-1')] p280: allowed=FALSE
ViasUnderSMD VIA_UnderSMD_191 [(Name = 'R8-2')] p281: allowed=FALSE
ViasUnderSMD VIA_UnderSMD_190 [(Name = 'R8-1')] p282: allowed=FALSE
ViasUnderSMD VIA_UnderSMD_189 [(Name = 'R7-2')] p283: allowed=FALSE
ViasUnderSMD VIA_UnderSMD_188 [(Name = 'R7-1')] p284: allowed=FALSE
ViasUnderSMD VIA_UnderSMD_187 [(Name = 'R6-2')] p285: allowed=FALSE
ViasUnderSMD VIA_UnderSMD_186 [(Name = 'R6-1')] p286: allowed=FALSE
ViasUnderSMD VIA_UnderSMD_185 [(Name = 'R5-2')] p287: allowed=FALSE
ViasUnderSMD VIA_UnderSMD_184 [(Name = 'R5-1')] p288: allowed=FALSE
ViasUnderSMD VIA_UnderSMD_183 [(Name = 'R4-2')] p289: allowed=FALSE
ViasUnderSMD VIA_UnderSMD_182 [(Name = 'R4-1')] p290: allowed=FALSE
ViasUnderSMD VIA_UnderSMD_181 [(Name = 'R3-2')] p291: allowed=FALSE
ViasUnderSMD VIA_UnderSMD_180 [(Name = 'R3-1')] p292: allowed=FALSE
ViasUnderSMD VIA_UnderSMD_179 [(Name = 'R2-2')] p293: allowed=FALSE
ViasUnderSMD VIA_UnderSMD_178 [(Name = 'R2-1')] p294: allowed=FALSE
ViasUnderSMD VIA_UnderSMD_177 [(Name = 'R1-2')] p295: allowed=FALSE
ViasUnderSMD VIA_UnderSMD_176 [(Name = 'R1-1')] p296: allowed=FALSE
ViasUnderSMD VIA_UnderSMD_175 [(Name = 'Q2-4')] p297: allowed=FALSE
ViasUnderSMD VIA_UnderSMD_174 [(Name = 'Q2-3')] p298: allowed=FALSE
ViasUnderSMD VIA_UnderSMD_173 [(Name = 'Q2-2')] p299: allowed=FALSE
ViasUnderSMD VIA_UnderSMD_172 [(Name = 'Q2-1')] p300: allowed=FALSE
ViasUnderSMD VIA_UnderSMD_171 [(Name = 'Q1-2')] p301: allowed=FALSE
ViasUnderSMD VIA_UnderSMD_170 [(Name = 'Q1-1')] p302: allowed=FALSE
ViasUnderSMD VIA_UnderSMD_169 [(Name = 'L1-2')] p303: allowed=FALSE
ViasUnderSMD VIA_UnderSMD_168 [(Name = 'L1-1')] p304: allowed=FALSE
ViasUnderSMD VIA_UnderSMD_167 [(Name = 'JP5-2')] p305: allowed=FALSE
ViasUnderSMD VIA_UnderSMD_166 [(Name = 'JP5-1')] p306: allowed=FALSE
ViasUnderSMD VIA_UnderSMD_165 [(Name = 'JP4-2')] p307: allowed=FALSE
ViasUnderSMD VIA_UnderSMD_164 [(Name = 'JP4-1')] p308: allowed=FALSE
ViasUnderSMD VIA_UnderSMD_163 [(Name = 'JP3-2')] p309: allowed=FALSE
ViasUnderSMD VIA_UnderSMD_162 [(Name = 'JP3-1')] p310: allowed=FALSE
ViasUnderSMD VIA_UnderSMD_161 [(Name = 'JP2-3')] p311: allowed=FALSE
ViasUnderSMD VIA_UnderSMD_160 [(Name = 'JP2-2')] p312: allowed=FALSE
ViasUnderSMD VIA_UnderSMD_159 [(Name = 'JP2-1')] p313: allowed=FALSE
ViasUnderSMD VIA_UnderSMD_158 [(Name = 'JP1-2')] p314: allowed=FALSE
ViasUnderSMD VIA_UnderSMD_157 [(Name = 'JP1-1')] p315: allowed=FALSE
ViasUnderSMD VIA_UnderSMD_156 [(Name = 'J1-5')] p316: allowed=FALSE
ViasUnderSMD VIA_UnderSMD_155 [(Name = 'J1-4')] p317: allowed=FALSE
ViasUnderSMD VIA_UnderSMD_154 [(Name = 'J1-3')] p318: allowed=FALSE
ViasUnderSMD VIA_UnderSMD_153 [(Name = 'J1-2')] p319: allowed=FALSE
ViasUnderSMD VIA_UnderSMD_152 [(Name = 'J1-1')] p320: allowed=FALSE
ViasUnderSMD VIA_UnderSMD_151 [(Name = 'DL4-2')] p321: allowed=FALSE
ViasUnderSMD VIA_UnderSMD_150 [(Name = 'DL4-1')] p322: allowed=FALSE
ViasUnderSMD VIA_UnderSMD_149 [(Name = 'DL3-2')] p323: allowed=FALSE
ViasUnderSMD VIA_UnderSMD_148 [(Name = 'DL3-1')] p324: allowed=FALSE
ViasUnderSMD VIA_UnderSMD_147 [(Name = 'DL2-2')] p325: allowed=FALSE
ViasUnderSMD VIA_UnderSMD_146 [(Name = 'DL2-1')] p326: allowed=FALSE
ViasUnderSMD VIA_UnderSMD_145 [(Name = 'DL1-2')] p327: allowed=FALSE
ViasUnderSMD VIA_UnderSMD_144 [(Name = 'DL1-1')] p328: allowed=FALSE
ViasUnderSMD VIA_UnderSMD_143 [(Name = 'D3-3')] p329: allowed=FALSE
ViasUnderSMD VIA_UnderSMD_142 [(Name = 'D3-1')] p330: allowed=FALSE
ViasUnderSMD VIA_UnderSMD_141 [(Name = 'D3-2')] p331: allowed=FALSE
ViasUnderSMD VIA_UnderSMD_140 [(Name = 'D2-3')] p332: allowed=FALSE
ViasUnderSMD VIA_UnderSMD_139 [(Name = 'D2-1')] p333: allowed=FALSE
ViasUnderSMD VIA_UnderSMD_138 [(Name = 'D2-2')] p334: allowed=FALSE
ViasUnderSMD VIA_UnderSMD_137 [(Name = 'D1-3')] p335: allowed=FALSE
ViasUnderSMD VIA_UnderSMD_136 [(Name = 'D1-1')] p336: allowed=FALSE
ViasUnderSMD VIA_UnderSMD_135 [(Name = 'D1-2')] p337: allowed=FALSE
ViasUnderSMD VIA_UnderSMD_134 [(Name = 'CN7-10')] p338: allowed=FALSE
ViasUnderSMD VIA_UnderSMD_133 [(Name = 'CN7-9')] p339: allowed=FALSE
ViasUnderSMD VIA_UnderSMD_132 [(Name = 'CN7-8')] p340: allowed=FALSE
ViasUnderSMD VIA_UnderSMD_131 [(Name = 'CN7-7')] p341: allowed=FALSE
ViasUnderSMD VIA_UnderSMD_130 [(Name = 'CN7-6')] p342: allowed=FALSE
ViasUnderSMD VIA_UnderSMD_129 [(Name = 'CN7-5')] p343: allowed=FALSE
ViasUnderSMD VIA_UnderSMD_128 [(Name = 'CN7-4')] p344: allowed=FALSE
ViasUnderSMD VIA_UnderSMD_127 [(Name = 'CN7-3')] p345: allowed=FALSE
ViasUnderSMD VIA_UnderSMD_126 [(Name = 'CN7-2')] p346: allowed=FALSE
ViasUnderSMD VIA_UnderSMD_125 [(Name = 'CN7-1')] p347: allowed=FALSE
ViasUnderSMD VIA_UnderSMD_124 [(Name = 'CN6-11')] p348: allowed=FALSE
ViasUnderSMD VIA_UnderSMD_123 [(Name = 'CN6-10')] p349: allowed=FALSE
ViasUnderSMD VIA_UnderSMD_122 [(Name = 'CN6-5')] p350: allowed=FALSE
ViasUnderSMD VIA_UnderSMD_121 [(Name = 'CN6-4')] p351: allowed=FALSE
ViasUnderSMD VIA_UnderSMD_120 [(Name = 'CN6-3')] p352: allowed=FALSE
ViasUnderSMD VIA_UnderSMD_119 [(Name = 'CN6-2')] p353: allowed=FALSE
ViasUnderSMD VIA_UnderSMD_118 [(Name = 'CN6-1')] p354: allowed=FALSE
ViasUnderSMD VIA_UnderSMD_117 [(Name = 'CN6-7')] p355: allowed=FALSE
ViasUnderSMD VIA_UnderSMD_116 [(Name = 'CN6-8')] p356: allowed=FALSE
ViasUnderSMD VIA_UnderSMD_115 [(Name = 'CN6-6')] p357: allowed=FALSE
ViasUnderSMD VIA_UnderSMD_114 [(Name = 'CN6-9')] p358: allowed=FALSE
ViasUnderSMD VIA_UnderSMD_113 [(Name = 'CN4-6')] p359: allowed=FALSE
ViasUnderSMD VIA_UnderSMD_112 [(Name = 'CN4-5')] p360: allowed=FALSE
ViasUnderSMD VIA_UnderSMD_111 [(Name = 'CN4-4')] p361: allowed=FALSE
ViasUnderSMD VIA_UnderSMD_110 [(Name = 'CN4-3')] p362: allowed=FALSE
ViasUnderSMD VIA_UnderSMD_109 [(Name = 'CN4-2')] p363: allowed=FALSE
ViasUnderSMD VIA_UnderSMD_108 [(Name = 'CN4-1')] p364: allowed=FALSE
ViasUnderSMD VIA_UnderSMD_107 [(Name = 'CN3-8')] p365: allowed=FALSE
ViasUnderSMD VIA_UnderSMD_106 [(Name = 'CN3-7')] p366: allowed=FALSE
ViasUnderSMD VIA_UnderSMD_105 [(Name = 'CN3-6')] p367: allowed=FALSE
ViasUnderSMD VIA_UnderSMD_104 [(Name = 'CN3-5')] p368: allowed=FALSE
ViasUnderSMD VIA_UnderSMD_103 [(Name = 'CN3-4')] p369: allowed=FALSE
ViasUnderSMD VIA_UnderSMD_102 [(Name = 'CN3-3')] p370: allowed=FALSE
ViasUnderSMD VIA_UnderSMD_101 [(Name = 'CN3-2')] p371: allowed=FALSE
ViasUnderSMD VIA_UnderSMD_100 [(Name = 'CN3-1')] p372: allowed=FALSE
ViasUnderSMD VIA_UnderSMD_99 [(Name = 'CN2-8')] p373: allowed=FALSE
ViasUnderSMD VIA_UnderSMD_98 [(Name = 'CN2-7')] p374: allowed=FALSE
ViasUnderSMD VIA_UnderSMD_97 [(Name = 'CN2-6')] p375: allowed=FALSE
ViasUnderSMD VIA_UnderSMD_96 [(Name = 'CN2-5')] p376: allowed=FALSE
ViasUnderSMD VIA_UnderSMD_95 [(Name = 'CN2-4')] p377: allowed=FALSE
ViasUnderSMD VIA_UnderSMD_94 [(Name = 'CN2-3')] p378: allowed=FALSE
ViasUnderSMD VIA_UnderSMD_93 [(Name = 'CN2-2')] p379: allowed=FALSE
ViasUnderSMD VIA_UnderSMD_92 [(Name = 'CN2-1')] p380: allowed=FALSE
ViasUnderSMD VIA_UnderSMD_91 [(Name = 'CN1-10')] p381: allowed=FALSE
ViasUnderSMD VIA_UnderSMD_90 [(Name = 'CN1-9')] p382: allowed=FALSE
ViasUnderSMD VIA_UnderSMD_89 [(Name = 'CN1-8')] p383: allowed=FALSE
ViasUnderSMD VIA_UnderSMD_88 [(Name = 'CN1-7')] p384: allowed=FALSE
ViasUnderSMD VIA_UnderSMD_87 [(Name = 'CN1-6')] p385: allowed=FALSE
ViasUnderSMD VIA_UnderSMD_86 [(Name = 'CN1-5')] p386: allowed=FALSE
ViasUnderSMD VIA_UnderSMD_85 [(Name = 'CN1-4')] p387: allowed=FALSE
ViasUnderSMD VIA_UnderSMD_84 [(Name = 'CN1-3')] p388: allowed=FALSE
ViasUnderSMD VIA_UnderSMD_83 [(Name = 'CN1-2')] p389: allowed=FALSE
ViasUnderSMD VIA_UnderSMD_82 [(Name = 'CN1-1')] p390: allowed=FALSE
ViasUnderSMD VIA_UnderSMD_81 [(Name = 'C38-2')] p391: allowed=FALSE
ViasUnderSMD VIA_UnderSMD_80 [(Name = 'C38-1')] p392: allowed=FALSE
ViasUnderSMD VIA_UnderSMD_79 [(Name = 'C37-2')] p393: allowed=FALSE
ViasUnderSMD VIA_UnderSMD_78 [(Name = 'C37-1')] p394: allowed=FALSE
ViasUnderSMD VIA_UnderSMD_77 [(Name = 'C36-2')] p395: allowed=FALSE
ViasUnderSMD VIA_UnderSMD_76 [(Name = 'C36-1')] p396: allowed=FALSE
ViasUnderSMD VIA_UnderSMD_75 [(Name = 'C35-2')] p397: allowed=FALSE
ViasUnderSMD VIA_UnderSMD_74 [(Name = 'C35-1')] p398: allowed=FALSE
ViasUnderSMD VIA_UnderSMD_73 [(Name = 'C34-2')] p399: allowed=FALSE
ViasUnderSMD VIA_UnderSMD_72 [(Name = 'C34-1')] p400: allowed=FALSE
ViasUnderSMD VIA_UnderSMD_71 [(Name = 'C33-2')] p401: allowed=FALSE
ViasUnderSMD VIA_UnderSMD_70 [(Name = 'C33-1')] p402: allowed=FALSE
ViasUnderSMD VIA_UnderSMD_69 [(Name = 'C32-2')] p403: allowed=FALSE
ViasUnderSMD VIA_UnderSMD_68 [(Name = 'C32-1')] p404: allowed=FALSE
ViasUnderSMD VIA_UnderSMD_67 [(Name = 'C31-2')] p405: allowed=FALSE
ViasUnderSMD VIA_UnderSMD_66 [(Name = 'C31-1')] p406: allowed=FALSE
ViasUnderSMD VIA_UnderSMD_65 [(Name = 'C30-2')] p407: allowed=FALSE
ViasUnderSMD VIA_UnderSMD_64 [(Name = 'C30-1')] p408: allowed=FALSE
ViasUnderSMD VIA_UnderSMD_63 [(Name = 'C29-2')] p409: allowed=FALSE
ViasUnderSMD VIA_UnderSMD_62 [(Name = 'C29-1')] p410: allowed=FALSE
ViasUnderSMD VIA_UnderSMD_61 [(Name = 'C28-2')] p411: allowed=FALSE
ViasUnderSMD VIA_UnderSMD_60 [(Name = 'C28-1')] p412: allowed=FALSE
ViasUnderSMD VIA_UnderSMD_59 [(Name = 'C27-2')] p413: allowed=FALSE
ViasUnderSMD VIA_UnderSMD_58 [(Name = 'C27-1')] p414: allowed=FALSE
ViasUnderSMD VIA_UnderSMD_57 [(Name = 'C26-2')] p415: allowed=FALSE
ViasUnderSMD VIA_UnderSMD_56 [(Name = 'C26-1')] p416: allowed=FALSE
ViasUnderSMD VIA_UnderSMD_55 [(Name = 'C25-2')] p417: allowed=FALSE
ViasUnderSMD VIA_UnderSMD_54 [(Name = 'C25-1')] p418: allowed=FALSE
ViasUnderSMD VIA_UnderSMD_53 [(Name = 'C24-2')] p419: allowed=FALSE
ViasUnderSMD VIA_UnderSMD_52 [(Name = 'C24-1')] p420: allowed=FALSE
ViasUnderSMD VIA_UnderSMD_51 [(Name = 'C23-2')] p421: allowed=FALSE
ViasUnderSMD VIA_UnderSMD_50 [(Name = 'C23-1')] p422: allowed=FALSE
ViasUnderSMD VIA_UnderSMD_49 [(Name = 'C22-2')] p423: allowed=FALSE
ViasUnderSMD VIA_UnderSMD_48 [(Name = 'C22-1')] p424: allowed=FALSE
ViasUnderSMD VIA_UnderSMD_47 [(Name = 'C21-2')] p425: allowed=FALSE
ViasUnderSMD VIA_UnderSMD_46 [(Name = 'C21-1')] p426: allowed=FALSE
ViasUnderSMD VIA_UnderSMD_45 [(Name = 'C20-2')] p427: allowed=FALSE
ViasUnderSMD VIA_UnderSMD_44 [(Name = 'C20-1')] p428: allowed=FALSE
ViasUnderSMD VIA_UnderSMD_43 [(Name = 'C19-2')] p429: allowed=FALSE
ViasUnderSMD VIA_UnderSMD_42 [(Name = 'C19-1')] p430: allowed=FALSE
ViasUnderSMD VIA_UnderSMD_41 [(Name = 'C18-2')] p431: allowed=FALSE
ViasUnderSMD VIA_UnderSMD_40 [(Name = 'C18-1')] p432: allowed=FALSE
ViasUnderSMD VIA_UnderSMD_39 [(Name = 'C17-2')] p433: allowed=FALSE
ViasUnderSMD VIA_UnderSMD_38 [(Name = 'C17-1')] p434: allowed=FALSE
ViasUnderSMD VIA_UnderSMD_37 [(Name = 'C16-2')] p435: allowed=FALSE
ViasUnderSMD VIA_UnderSMD_36 [(Name = 'C16-1')] p436: allowed=FALSE
ViasUnderSMD VIA_UnderSMD_35 [(Name = 'C15-2')] p437: allowed=FALSE
ViasUnderSMD VIA_UnderSMD_34 [(Name = 'C15-1')] p438: allowed=FALSE
ViasUnderSMD VIA_UnderSMD_33 [(Name = 'C14-2')] p439: allowed=FALSE
ViasUnderSMD VIA_UnderSMD_32 [(Name = 'C14-1')] p440: allowed=FALSE
ViasUnderSMD VIA_UnderSMD_31 [(Name = 'C13-2')] p441: allowed=FALSE
ViasUnderSMD VIA_UnderSMD_30 [(Name = 'C13-1')] p442: allowed=FALSE
ViasUnderSMD VIA_UnderSMD_29 [(Name = 'C12-2')] p443: allowed=FALSE
ViasUnderSMD VIA_UnderSMD_28 [(Name = 'C12-1')] p444: allowed=FALSE
ViasUnderSMD VIA_UnderSMD_27 [(Name = 'C11-2')] p445: allowed=FALSE
ViasUnderSMD VIA_UnderSMD_26 [(Name = 'C11-1')] p446: allowed=FALSE
ViasUnderSMD VIA_UnderSMD_25 [(Name = 'C10-2')] p447: allowed=FALSE
ViasUnderSMD VIA_UnderSMD_24 [(Name = 'C10-1')] p448: allowed=FALSE
ViasUnderSMD VIA_UnderSMD_23 [(Name = 'C9-2')] p449: allowed=FALSE
ViasUnderSMD VIA_UnderSMD_22 [(Name = 'C9-1')] p450: allowed=FALSE
ViasUnderSMD VIA_UnderSMD_21 [(Name = 'C8-2')] p451: allowed=FALSE
ViasUnderSMD VIA_UnderSMD_20 [(Name = 'C8-1')] p452: allowed=FALSE
ViasUnderSMD VIA_UnderSMD_19 [(Name = 'C7-2')] p453: allowed=FALSE
ViasUnderSMD VIA_UnderSMD_18 [(Name = 'C7-1')] p454: allowed=FALSE
ViasUnderSMD VIA_UnderSMD_17 [(Name = 'C6-2')] p455: allowed=FALSE
ViasUnderSMD VIA_UnderSMD_16 [(Name = 'C6-1')] p456: allowed=FALSE
ViasUnderSMD VIA_UnderSMD_15 [(Name = 'C5-2')] p457: allowed=FALSE
ViasUnderSMD VIA_UnderSMD_14 [(Name = 'C5-1')] p458: allowed=FALSE
ViasUnderSMD VIA_UnderSMD_13 [(Name = 'C4-2')] p459: allowed=FALSE
ViasUnderSMD VIA_UnderSMD_12 [(Name = 'C4-1')] p460: allowed=FALSE
ViasUnderSMD VIA_UnderSMD_11 [(Name = 'C3-2')] p461: allowed=FALSE
ViasUnderSMD VIA_UnderSMD_10 [(Name = 'C3-1')] p462: allowed=FALSE
ViasUnderSMD VIA_UnderSMD_9 [(Name = 'C2-2')] p463: allowed=FALSE
ViasUnderSMD VIA_UnderSMD_8 [(Name = 'C2-1')] p464: allowed=FALSE
ViasUnderSMD VIA_UnderSMD_7 [(Name = 'C1-2')] p465: allowed=FALSE
ViasUnderSMD VIA_UnderSMD_6 [(Name = 'C1-1')] p466: allowed=FALSE
ViasUnderSMD VIA_UnderSMD_5 [(Name = 'BATT2-3')] p467: allowed=FALSE
ViasUnderSMD VIA_UnderSMD_4 [(Name = 'BATT2-2')] p468: allowed=FALSE
ViasUnderSMD VIA_UnderSMD_3 [(Name = 'BATT2-1')] p469: allowed=FALSE
ViasUnderSMD VIA_UnderSMD_2 [(Name = 'BATT1-1')] p470: allowed=FALSE
ViasUnderSMD VIA_UnderSMD_1 [(Name = 'BATT1-2')] p471: allowed=FALSE
Width [All] p1: maxlimit=0.762 minlimit=0.102 preferedwidth=0.152
21 further rules are at their usual default settings.

## Classes and differential pairs
component class USB_MICRO: C27 C28 C29 C31 C32 C33 C34 C35 C36 C39 CN6 CN7 DL4 R43 R44 R45 R46 R47 R48 R49 R52 R53 R54 R55 R56 R57 R58 R59 R60 R61 ST1 TP1 TP2 TP3 U7 U8 V1 V2 V3 V4 X1
component class Supply: BATT1 BATT2 C17 C19 C20 C21 C22 C23 C24 C25 C26 C37 C38 C40 C41 D2 D3 DL1 DL2 DL3 JP2 PUSH1 PUSH2 R26 R27 R28 R29 R30 R31 R32 R33 R34 R35 R36 R37 R38 R39 R40 R41 R42 R50 R51 RESET U3 U4 U5 U6 U9
component class BlueNRG-LP: C1 C2 C3 C4 C5 C6 C7 C8 C9 C10 C11 C12 C13 C14 C15 C16 C18 C30 C42 C43 C44 CN1 CN2 CN3 CN4 D1 J1 JP1 JP3 JP4 JP5 L1 L2 L3 L4 Q1 Q2 R1 R2 R3 R4 R5 R6 R7 R8 R9 R10 R11 R12 R13 R14 R15 R16 R17 R18 R19 R20 R21 R22 R23 R24 R25 TP4 U1 U2

## Components (designator, comment, footprint, x,y, rotation, side; value= is the part's Value field where it differs from the comment)
BATT1 "Battery holder" PACCO_BATT_2 13.589,38.913 r270 bottom locked
BATT2 "CR2032" CR2032_BATTERY_HOLDER 29.453,1.041 r180 bottom
C1 "22p_0402" 0402_CAP_NP 60.653,34.404 r270 top
C2 "22p_0402" 0402_CAP_NP 59.108,34.42 r270 top
C3 "4u7_0402" 0402_CAP_NP 56.981,30.904 r270 top
C4 "100n_0402" 0402_CAP_NP 57.97,30.896 r270 top
C5 "1.2p_0402" 0402_CAP_NP 64.948,24.811 r90 top
C6 "0.5p_0402" 0402_CAP_NP 68.073,24.826 r90 top
C7 "220n_0402" 0402_CAP_NP 59.035,29.576 r270 top
C8 "4u7_0402" 0402_CAP_NP 54.051,28.067 r0 top
C9 "100n_0402" 0402_CAP_NP 54.064,27.038 r0 top
C10 "100n_0402" 0402_CAP_NP 63.363,26.44 r180 top
C11 "3p_0402" 0402_CAP_NP 64.369,27.366 r180 top
C12 "100n_0402" 0402_CAP_NP 53.644,24.168 r0 top
C13 "100n_0402" 0402_CAP_NP 53.812,25.105 r0 top
C14 "100n_0402" 0402_CAP_NP 63.002,23.173 r90 top
C15 "100n_0402" 0402_CAP_NP 53.812,26.06 r0 top
C16 "100n_0402" 0402_CAP_NP 60.454,28.753 r270 top
C17 "1u_0402" 0402_CAP_NP 14.072,20.168 r90 top
C18 "3p_0402" 0402_CAP_NP 63.942,22.833 r90 top
C19 "1u_0402" 0402_CAP_NP 20.422,20.168 r90 top
C20 "10n_0402" 0402_CAP_NP 10.414,44.348 r90 top
C21 "4.7u_0603" 0603_CAP_NP 37.046,41.123 r180 top
C22 "100n_0402" 0402_CAP_NP 34.569,39.065 r270 top
C23 "100n_0402" 0402_CAP_NP 36.779,39.726 r180 top
C24 "100n_0402" 0402_CAP_NP 39.116,37.948 r270 top
C25 "100n_0402" 0402_CAP_NP 50.267,37.44 r180 top
C26 "100n_0402" 0402_CAP_NP 47.092,35.484 r180 top
C27 "20p_0402" 0402_CAP_NP 3.116,21.26 r180 top
C28 "20p_0402" 0402_CAP_NP 2.972,33.706 r180 top
C29 "100n_0402" 0402_CAP_NP 6.901,17.272 r0 top
C30 "3.4p_0402" 0402_CAP_NP 63.289,25.439 r180 top
C31 "100n_0402" 0402_CAP_NP 16.434,29.312 r180 top
C32 "100n_0402" 0402_CAP_NP 14.199,24.028 r180 top
C33 "100n_0402" 0402_CAP_NP 7.163,31.648 r270 top
C34 "1u_0402" 0402_CAP_NP 8.23,31.648 r270 top
C35 "100n_0402" 0402_CAP_NP 8.306,23.571 r90 top
C36 "1u_0402" 0402_CAP_NP 7.239,23.571 r90 top
C37 "1u_0402" 0402_CAP_NP 22.352,35.789 r0 top
C38 "100n_0402" 0402_CAP_NP 22.352,37.338 r0 top
C39 "100n_0402" 0402_CAP_NP 11.252,31.496 r180 top
C40 "10n_0402" 0402_CAP_NP 14.351,13.352 r270 top
C41 "10n_0402" 0402_CAP_NP 23.546,13.581 r270 top
C42 "TBD" 0402_CAP_NP 75.489,25.002 r90 top
C43 "0.8p_0402" 0402_CAP_NP 78.816,25.002 r90 top
C44 "100p_0402" 0402_CAP_NP 75.489,27.28 r90 top
CN1 "CON10" HDR1X10 46.863,51.171 r180 top locked
CN2 "CON8" HDR1X8 33.126,2.916 r0 top locked
CN3 "CON8" HDR1X8 68.693,51.171 r180 top locked
CN4 "CON6" HDR1X6 56.004,2.916 r0 top
CN6 "USB micro B" "MICRO USB" 1.414,13.47 r90 top
CN7 "CONN" AMPMODE10_50M 2.388,43.307 r270 top
D1 "DEV3L" DEV3L0603 55.946,28.972 r90 top
D2 "DEV3L" DEV3L0603 29.743,29.515 r270 top
D3 "DEV3L" DEV3L0603 29.769,26.238 r270 top
Designator1 "Comment" FIDUCIAL 6.94,47.211 r0 top
Designator2 "Comment" FIDUCIAL 72.447,8.409 r0 top
DL1 "Diodo_led" "SMD _LED" 7.747,20.32 r0 top
DL2 "Diodo_led" "SMD _LED" 26.01,29.515 r180 top
DL3 "BLUE" "SMD _LED" 26.009,26.238 r180 top
DL4 "RED" "SMD _LED" 16.739,31.445 r180 top
J1 "UFL" UFL_SMT 73.339,30.385 r0 top value=SMA_RF
JP1 "Jumper 2" "HDR 2 X 1 M" 53.213,8.357 r90 top
JP2 "Jumper 3" "HDR 3 X 1 M" 27.203,19.355 r180 top
JP3 "Jumper 2" "HDR 2 X 1 M" 49.962,8.407 r90 top
JP4 "Jumper 2" "HDR 2 X 1 M" 46.812,8.382 r90 top
JP5 "Jumper 2" "HDR 2 X 1 M" 43.612,8.407 r90 top
L1 "3n_0402" 0402-A 66.586,25.465 r0 top
L2 "1n_0402" 0402-A 47.432,25.021 r0 top
L3 "2.7n_0402" 0402-A 77.249,25.502 r0 top
L4 "22n_0402" 0402-A 56.868,28.472 r90 top
PUSH1 "RESET" B3FS_SWITCH 14.757,5.105 r270 top (schematic designator SW2)
PUSH2 "RESET" B3FS_SWITCH 24.003,5.131 r270 top (schematic designator SW3)
Q1 "XTAL_LS" NX2012SA 59.108,32.469 r0 top
Q2 "XTAL_HS" NX2016SA 62.13,30.489 r270 top
R1 "0_0402" 0402_RES 24.003,44.133 r90 top
R2 "0_0402" 0402_RES 26.581,44.133 r90 top
R3 "0_0402" 0402_RES 29.083,44.133 r90 top
R4 "0_0402" 0402_RES 34.163,44.133 r90 top
R5 "0_0402" 0402_RES 35.636,9.779 r90 top
R6 "0_0402" 0402_RES 36.703,44.133 r90 top
R7 "0_0402" 0402_RES 39.243,44.133 r90 top
R8 "0_0402" 0402_RES 41.783,44.133 r90 top
R9 "0_0402" 0402_RES 38.202,9.703 r90 top
R10 "0_0402" 0402_RES 44.323,44.107 r90 top
R11 "0_0402" 0402_RES 46.863,44.133 r90 top
R12 "0_0402" 0402_RES 50.876,44.133 r90 top
R13 "0_0402" 0402_RES 55.994,44.107 r90 top
R14 "0_0402" 0402_RES 53.454,44.133 r90 top
R15 "0_0402" 0402_RES 55.982,9.042 r90 top
R16 "0_0402" 0402_RES 58.534,44.133 r90 top
R17 "0_0402" 0402_RES 58.534,9.042 r90 top
R18 "0_0402" 0402_RES 61.074,44.107 r90 top
R19 "0_0402" 0402_RES 61.1,9.042 r90 top
R20 "0_0402" 0402_RES 63.627,44.133 r90 top
R21 "0_0402" 0402_RES 63.627,9.068 r90 top
R22 "0_0402" 0402_RES 66.142,44.12 r90 top
R23 "0_0402" 0402_RES 66.18,9.042 r90 top
R24 "0_0402" 0402_RES 68.694,44.12 r90 top
R25 "0_0402" 0402_RES 68.72,9.042 r90 top
R26 "100k_0402" 0402_RES 9.195,44.196 r90 top
R27 "100_0402" 0402_RES 16.739,13.462 r270 top
R28 "100_0402" 0402_RES 20.244,45.491 r90 top
R29 "470_0402" 0402_RES 11.201,20.345 r0 top
R30 "100_0402" 0402_RES 24.765,13.691 r270 top
R31 "100k_0402" 0402_RES 15.57,13.462 r90 top
R32 "100k_0402" 0402_RES 22.327,13.716 r90 top
R33 "0_0402" 0402_RES 34.569,36.678 r90 top
R34 "10K_0402" 0402_RES 33.35,37.795 r270 top
R35 "0_0402" 0402_RES 37.389,34.011 r180 top
R36 "10K_0402" 0402_RES 37.338,35.331 r180 top
R37 "0_0402" 0402_RES 45.618,40.564 r180 top
R38 "0_0402" 0402_RES 47.6,41.783 r0 top
R39 "0_0402" 0402_RES 48.285,40.538 r0 top
R40 "680_0402" 0402_RES 30.429,31.547 r0 top
R41 "0_0402" 0402_RES 43.764,38.938 r0 top
R42 "0_0402" 0402_RES 43.713,37.414 r0 top
R43 "1.5k_0402" 0402_RES 7.493,12.04 r180 top
R44 "1M_0402" 0402_RES 7.239,27.356 r270 top
R45 "0_0402" 0402_RES 11.379,13.945 r180 top
R46 "0_0402" 0402_RES 11.379,15.85 r180 top
R47 "0_0402" 0402_RES 34.62,22.555 r180 top
R48 "0_0402" 0402_RES 34.62,23.825 r180 top
R49 "0_0402" 0402_RES 34.62,25.07 r0 top
R50 "NC" 0402_RES 22.454,40.132 r0 top value=0_0402
R51 "NC" 0402_RES 29.312,40.234 r180 top value=0_0402
R52 "5k_0402" 0402_RES 9.5,22.832 r90 top
R53 "0_0402" 0402_RES 34.62,21.26 r0 top
R54 "0_0402" 0402_RES 34.62,20.015 r180 top
R55 "100_0402" 0402_RES 16.459,28.143 r180 top
R56 "0_0402" 0402_RES 34.62,18.745 r180 top
R57 "1k_0402" 0402_RES 10.516,22.835 r270 top
R58 "1k5_0402" 0402_RES 6.833,37.592 r90 top
R59 "0_0402" 0402_RES 34.62,26.365 r180 top
R60 "0_0402" 0402_RES 16.434,26.797 r180 top
R61 "680_0402" 0402_RES 20.295,31.445 r0 top
RESET "RESET" B3FS_SWITCH 15.113,48.87 r90 top (schematic designator SW1)
ST1 "stlogo" stlogo 112.725,-39.319 r0 top
TP1 "GND" TESTP 69.113,44.602 r270 top
TP2 "GND" TESTP 6.579,48.133 r270 top
TP3 "GND" TESTP 31.354,14.45 r270 top
TP4 "VDDA" FIDUCIAL 53.447,22.898 r270 top
U1 "BlueNRG-LP" QFN48_6X6 58.356,23.736 r90 top
U2 "" DLF162500LT 69.38,25.476 r0 top
U3 "LDLN025M33R" *SOT95P280X145-5N 17.145,19.863 r0 top
U4 "LPS22HB" HLGA-10L-2X2 35.903,38.24 r0 top
U5 "AAAF3529" AAAF3529L 25.06,33.225 r0 top
U6 "LSM6DS3" LGA14 45.669,38.875 r0 top
U7 "Part Number: STM32F10XRXY" PCBCOMPONENT_1 11.393,27.537 r0 top value=Value
U8 "USBLC6-2SC6" SOT23-6L_S 8.153,14.884 r90 top
U9 "MP34DT05-A" MP34DT05-A 25.794,38.036 r90 top
V1 "VITE" "FORO 3MM" 75.248,4.013 r0 top
V2 "VITE" "FORO 3MM" 4.216,3.556 r0 top
V3 "VITE" "FORO 3MM" 76.098,50.114 r0 top
V4 "VITE" "FORO 3MM" 3.988,50.419 r0 top
X1 "8MHz" QUARZO 3.607,29.769 r270 top

## Footprints (in the part's own frame and the unit in brackets; to place one, negate y for a bottom-side part, rotate by r counter-clockwise, add the part's x,y. Pads: shape width x height; smd on the part's side, far side on the other; paste and mask are expansions set on the pad)
0402-A [mm] "Chip Inductor, Body 1.0x0.5mm, IPC High Density"
  rect 0.6x0.5 smd: 1(-0.5,0) 2(0.5,0)
  silkscreen extent -1.1,-0.15 -1.1,0.15, body extent -0.55,-0.3 0.55,0.3, height 0.55
0402_CAP_NP [mm]
  rect 0.635x0.508 smd mask+0: 1(-0.5,0) 2(0.5,0)
  silkscreen extent -0.97,-0.38 0.99,0.41, body extent -0.99,-0.36 1.04,0.36, height 0.82
0402_RES [mil]
  rect 25x20 smd: 1(-25,0) 2(25,0)
  silkscreen extent -43,-15 43,16, body extent -38,-11 39,13, height 16
0603_CAP_NP [mm]
  rect 0.8x1 smd: 1(-0.902,0) 2(0.902,0)
  silkscreen extent -1.41,-0.61 1.41,0.61, body extent -1.28,-0.46 1.26,0.48, height 0.82
*SOT95P280X145-5N [mm]
  rect 1.32x0.59 smd: 1(-1.145,0.95) 2(-1.145,0) 3(-1.145,-0.95) 4(1.145,-0.95) 5(1.145,0.95)
  silkscreen extent -2.5,-1.56 0.8,1.56, body extent -1.8,-1.24 1.8,1.24, height 0.51
AAAF3529L [mm]
  rect 1.15x0.699 smd: 1(0.01,0.01) 2(0.01,-0.84) 3(0.01,-1.69) 4(2.73,-1.69) 5(2.73,-0.84) 6(2.73,0.01)
  silkscreen extent 0.02,-2.06 2.75,0.38, body extent -0.57,-2.07 3.3,0.39, height 0.25
AMPMODE10_50M [mil]
  rect 35x35 hole 20: 1(0,0)
  round 35 hole 20: 2(0,50) 3(50,0) 4(50,50) 5(100,0) 6(100,50) 7(150,0) 8(150,50) 9(200,0) 10(200,50)
  silkscreen extent -117,-77 321,120
B3FS_SWITCH [mm]
  rect 1.6x1.4 smd: 1(3.998,-2.244) 2(-4.012,-2.244) 3(3.998,2.246) 4(-4.012,2.246)
  silkscreen extent -3.17,-3.15 3.14,3.16, body extent -4.57,-3.15 4.57,3.16, height 4.57
CR2032_BATTERY_HOLDER [mil]
  rect 109.83x200 smd: 1(-55.52,276) 2(812.3,276)
  round 393.7 smd: 3(379.57,278)
  silkscreen extent -35,-33 794,567
DEV3L0603 [mil]
  rect 32x38 smd: 1(56,0) 2(0,0) 3(56,59)
  silkscreen extent -18,-21 74,80
DLF162500LT [mil]
  rect 10.8x27.53 smd: 1(-24.5,0) 3(24.5,0)
  rect 17.7x9.63 smd: 2(0,-9) 4(0,9)
  silkscreen extent -30,-14 30,14, body extent -30,-14 30,14, height 20
FIDUCIAL [mm]
  round 1 smd: 1(0,0)
"FORO 3MM" [mil]
  round 145 hole 125: 1(0,0)
  silkscreen extent -125,-125 125,125
HDR1X6 [mm] "Connector; Header; 6 Position"
  rect 1.5x1.5 hole 0.9 paste+0 mask+0: 1(0,0)
  round 1.5 hole 0.9 paste+0 mask+0: 2(2.54,0) 3(5.08,0) 4(7.62,0) 5(10.16,0) 6(12.7,0)
  silkscreen extent -1.27,-1.27 13.97,1.27, body extent -1.27,-1.27 13.97,1.27, height 8.5
HDR1X8 [mm] "Connector; Header; 8 Position"
  rect 1.5x1.5 hole 0.9 paste+0 mask+0: 1(0,0)
  round 1.5 hole 0.9 paste+0 mask+0: 2(2.54,0) 3(5.08,0) 4(7.62,0) 5(10.16,0) 6(12.7,0) 7(15.24,0) 8(17.78,0)
  silkscreen extent -1.27,-1.27 19.05,1.27, body extent -1.27,-1.27 19.05,1.27, height 8.5
HDR1X10 [mm] "Connector; Header; 10 Position"
  rect 1.5x1.5 hole 0.9 paste+0 mask+0: 1(0,0)
  round 1.5 hole 0.9 paste+0 mask+0: 2(2.54,0) 3(5.08,0) 4(7.62,0) 5(10.16,0) 6(12.7,0) 7(15.24,0) 8(17.78,0) 9(20.32,0) 10(22.86,0)
  silkscreen extent -1.27,-1.27 24.13,1.27, body extent -1.27,-1.27 24.13,3.93, height 8.5
"HDR 2 X 1 M" [mm] "Connector; Header; 2 Position"
  rect 1.5x1.5 hole 0.9: 1(-1.27,0)
  round 1.5 hole 0.9: 2(1.27,0)
  silkscreen extent -2.54,-1.27 2.54,1.27, body extent -2.54,-1.27 2.54,1.27, height 8.38
"HDR 3 X 1 M" [mm] "Connector; Header; 3 Position"
  rect 1.5x1.5 hole 0.9: 1(-2.54,0)
  round 1.5 hole 0.9: 2(0,0) 3(2.54,0)
  silkscreen extent -3.81,-1.27 3.81,1.27, body extent -3.81,-1.24 3.81,1.24, height 8.54
HLGA-10L-2X2 [mil]
  rect 25x11.8 smd: 1(-2,-15) 2(-2,-37) 6(65.5,-37) 7(65.5,-15.5)
  rect 11.8x25 smd: 3(10,-59.5) 4(31.5,-59.5) 5(53,-59.5) 8(52.5,7.5) 9(31.5,8) 10(9.5,8)
  silkscreen extent -8,-66 71,14, body extent -14,-72 78,20, height 20
LGA14 [mil]
  rect 25x9.83 smd: 1(-1,3) 2(-1,-17) 3(-1,-37) 4(-1,-57) 8(103,-57) 9(103,-37) 10(103,-17) 11(103,3)
  rect 9.83x25 smd: 5(31,-71) 6(51,-71) 7(71,-71) 12(71,16) 13(51,16) 14(31,16)
  silkscreen extent -8,-77 110,23, body extent -14,-84 116,28, height 20
"MICRO USB" [mm]
  rect 0.4x1.35 smd: 1(2.45,-2.675) 2(1.8,-2.675) 3(1.15,-2.675) 4(0.5,-2.675) 5(-0.15,-2.675)
  rect 1.6x1.4 smd: 6(-2.05,-2.45) 11(4.35,-2.45)
  rect 2.3x1.3 smd: 7(-2.6,0) 10(4.9,0)
  rect 1.8x1.9 smd: 8(0,0) 9(2.3,0)
  silkscreen extent -4.12,-3.67 6.44,1.3, body extent -3.26,-2.9 5.54,2.7, height 2.53
MP34DT05-A [mil]
  rect 15.73x37.4 smd: 1(-18,26.5) 2(-18,-26.5) 3(18,-26.5) 4(18,26.5)
  rect 51.17x13.77 smd: 5(0,-68.5) 6(0,67.5)
  rect 13.77x90.53 smd: 7(-49,-0.5) 8(49,0)
  silkscreen extent -61,-80 60,80, body extent -56,-75 56,74, height 20
NX2012SA [mil]
  rect 40x50 smd: 1(0,0) 2(60,0)
  silkscreen extent -21,-26 81,26, body extent -20,-25 80,25, height 20
NX2016SA [mm]
  rect 0.599x0.799 smd: 1(0,0) 2(1.8,0) 3(1.8,1.2) 4(0,1.2)
  silkscreen extent -0.35,-0.45 2.15,1.65, body extent -0.3,-0.4 2.1,1.6, height 0.51
PACCO_BATT_2 [mil]
  rect 100x100 hole 43: 1(172,0) 2(0,0)
  silkscreen extent -409,-2284 580,76